# Altium PCB SW.PcbDoc (part 1 of 2)
Units mm, origin at the board's own origin, x right, y up, seen from the top; angles counter-clockwise.
Board outline 130 x 71 mm, 4 copper layers (Top Layer, Mid Layer 1, Mid Layer 2, Bottom Layer), stack 1.57 mm thick; 152 components, 276 nets, 868 pads, 520 vias.
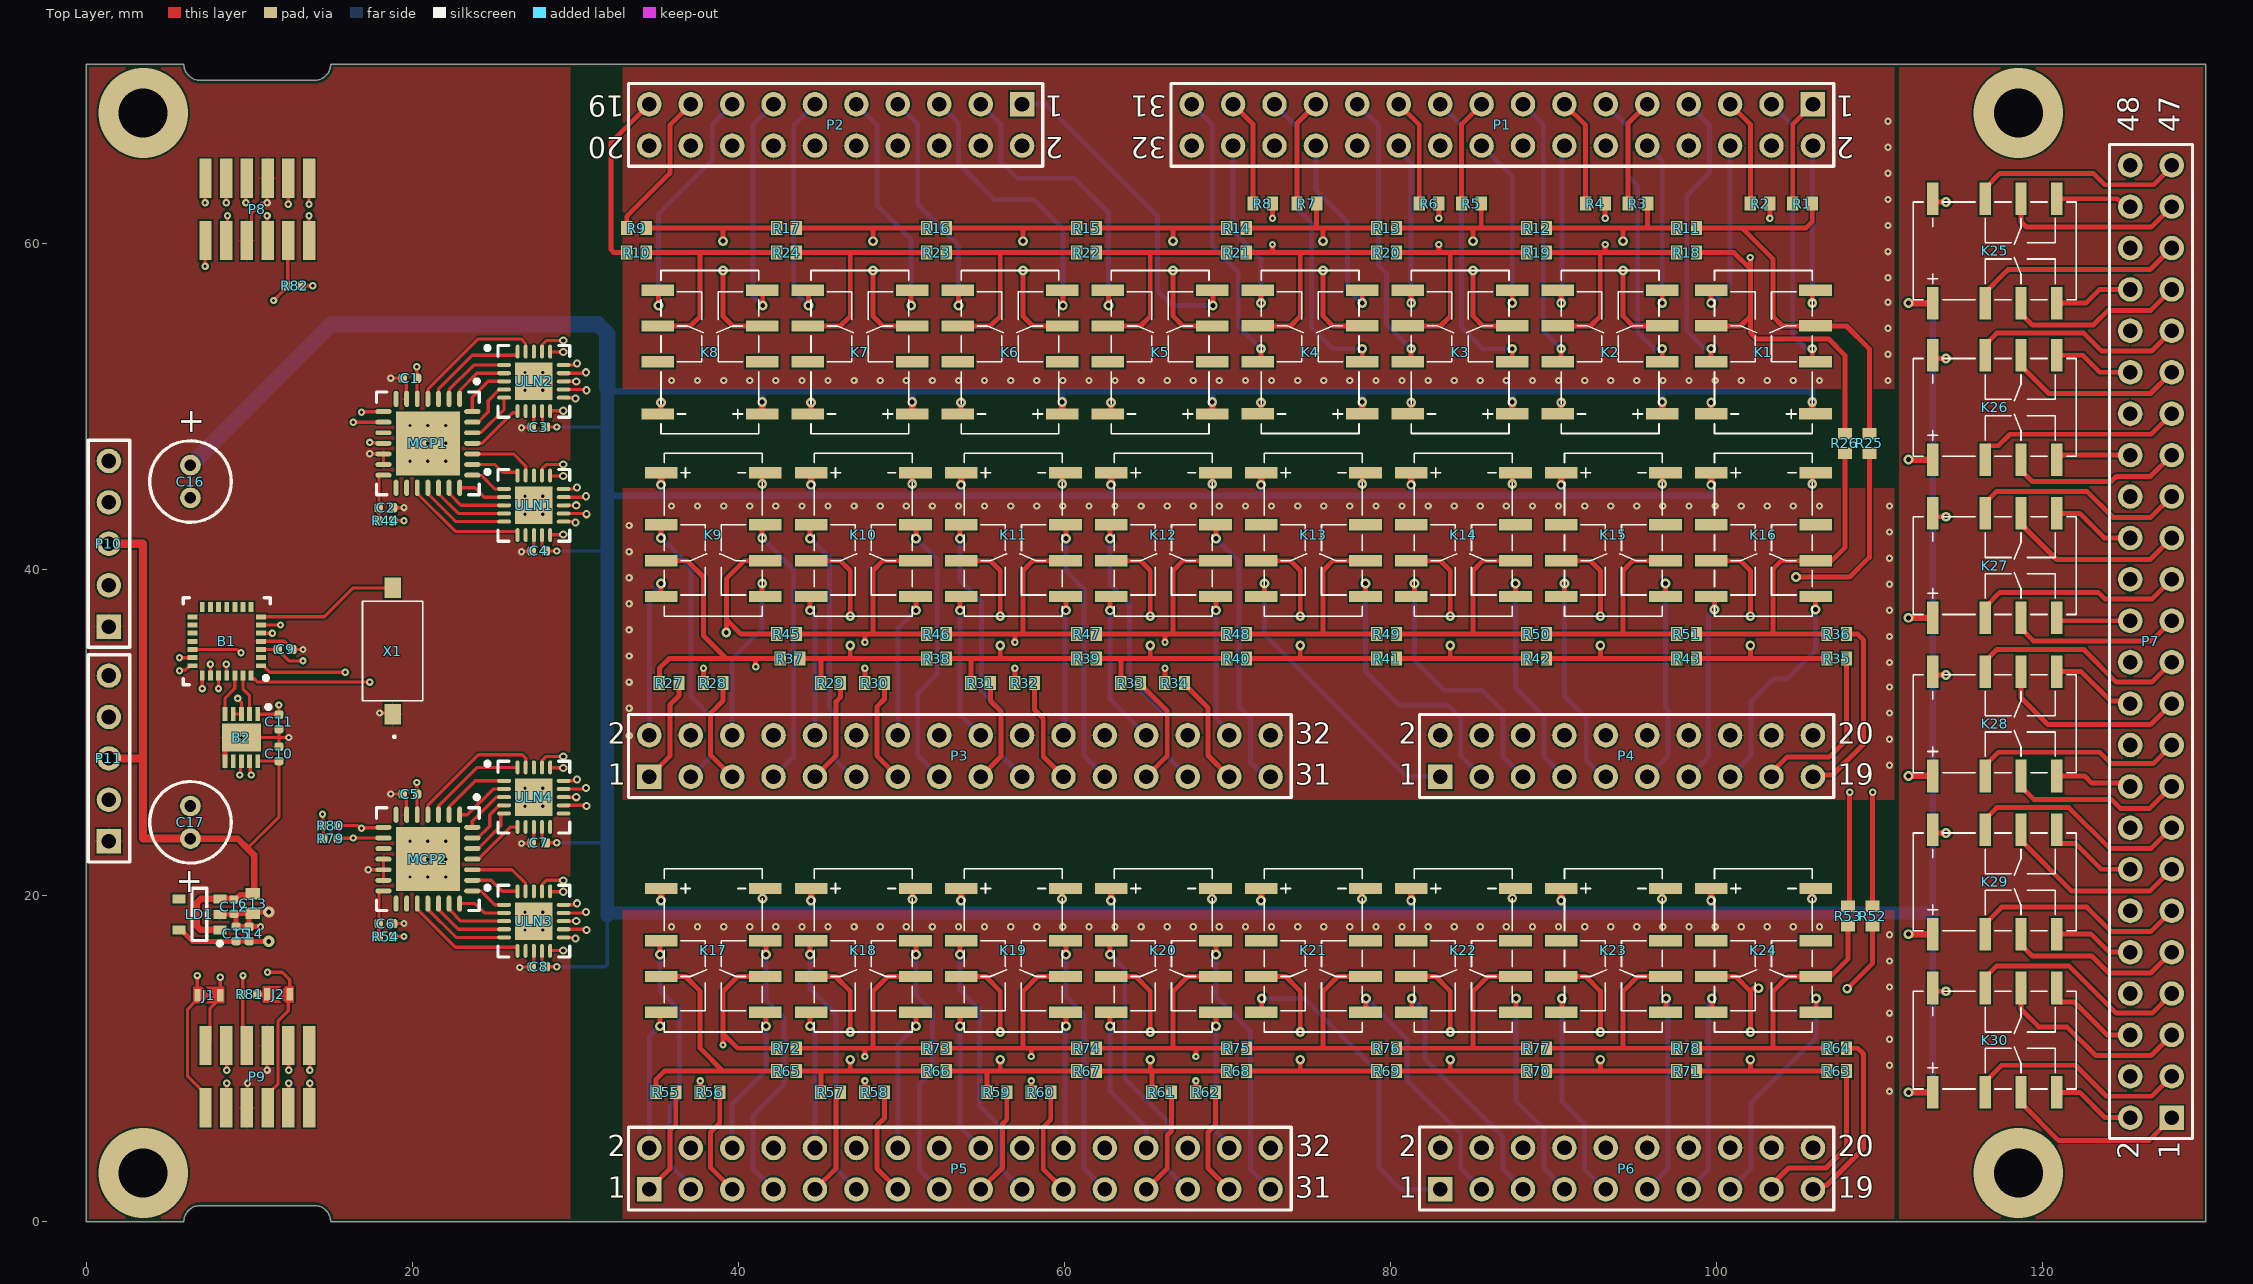
[diagram p0: Top Layer view]
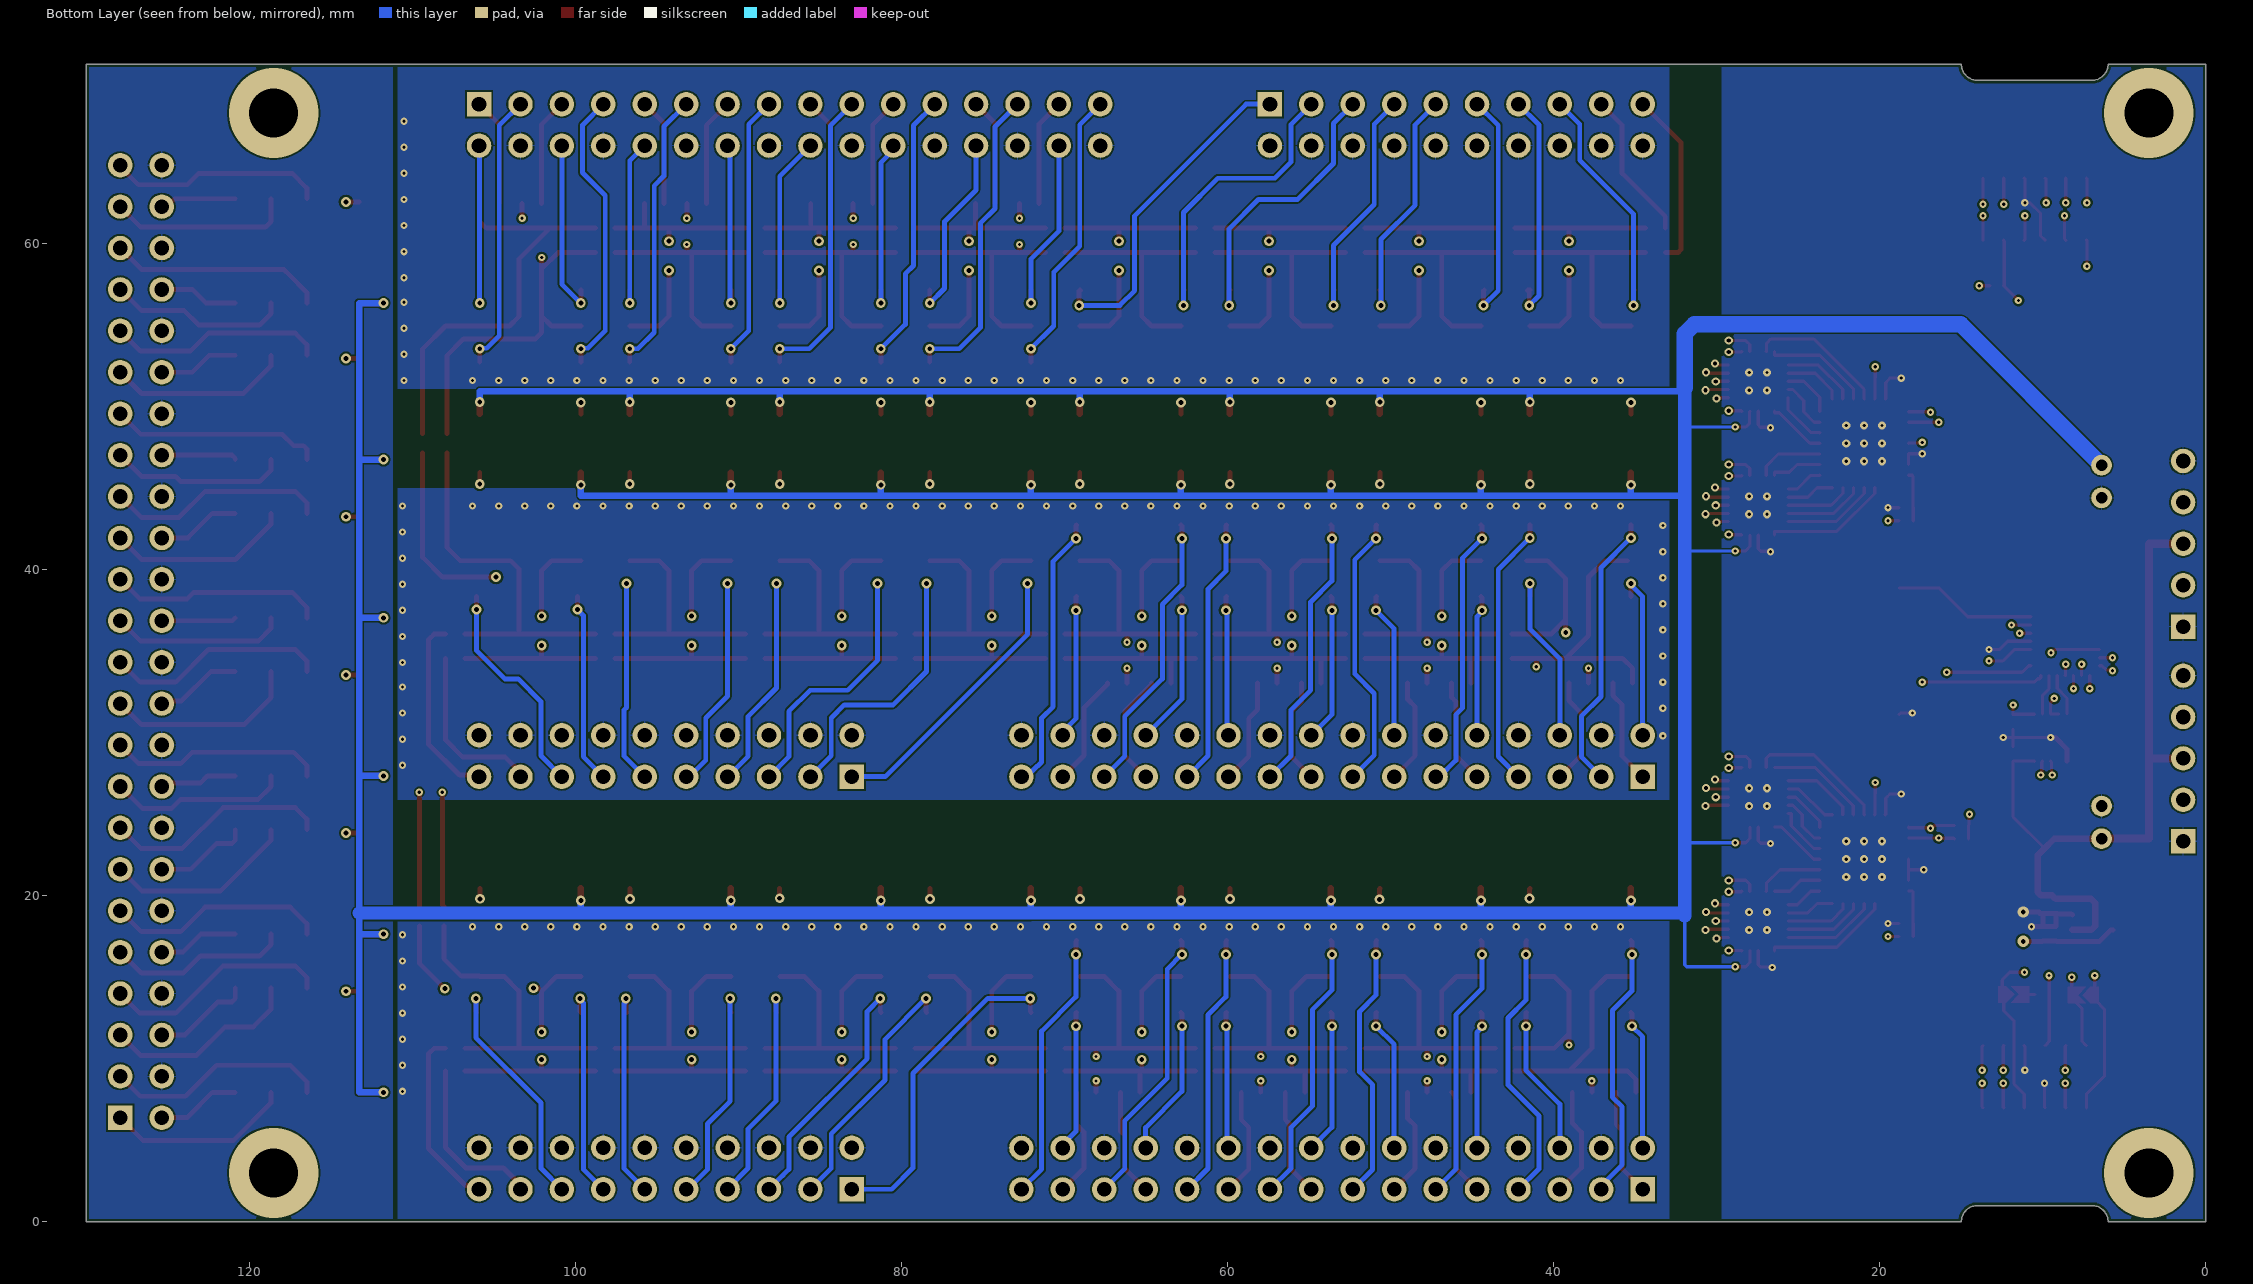
[diagram p1: Bottom Layer view, seen from below]
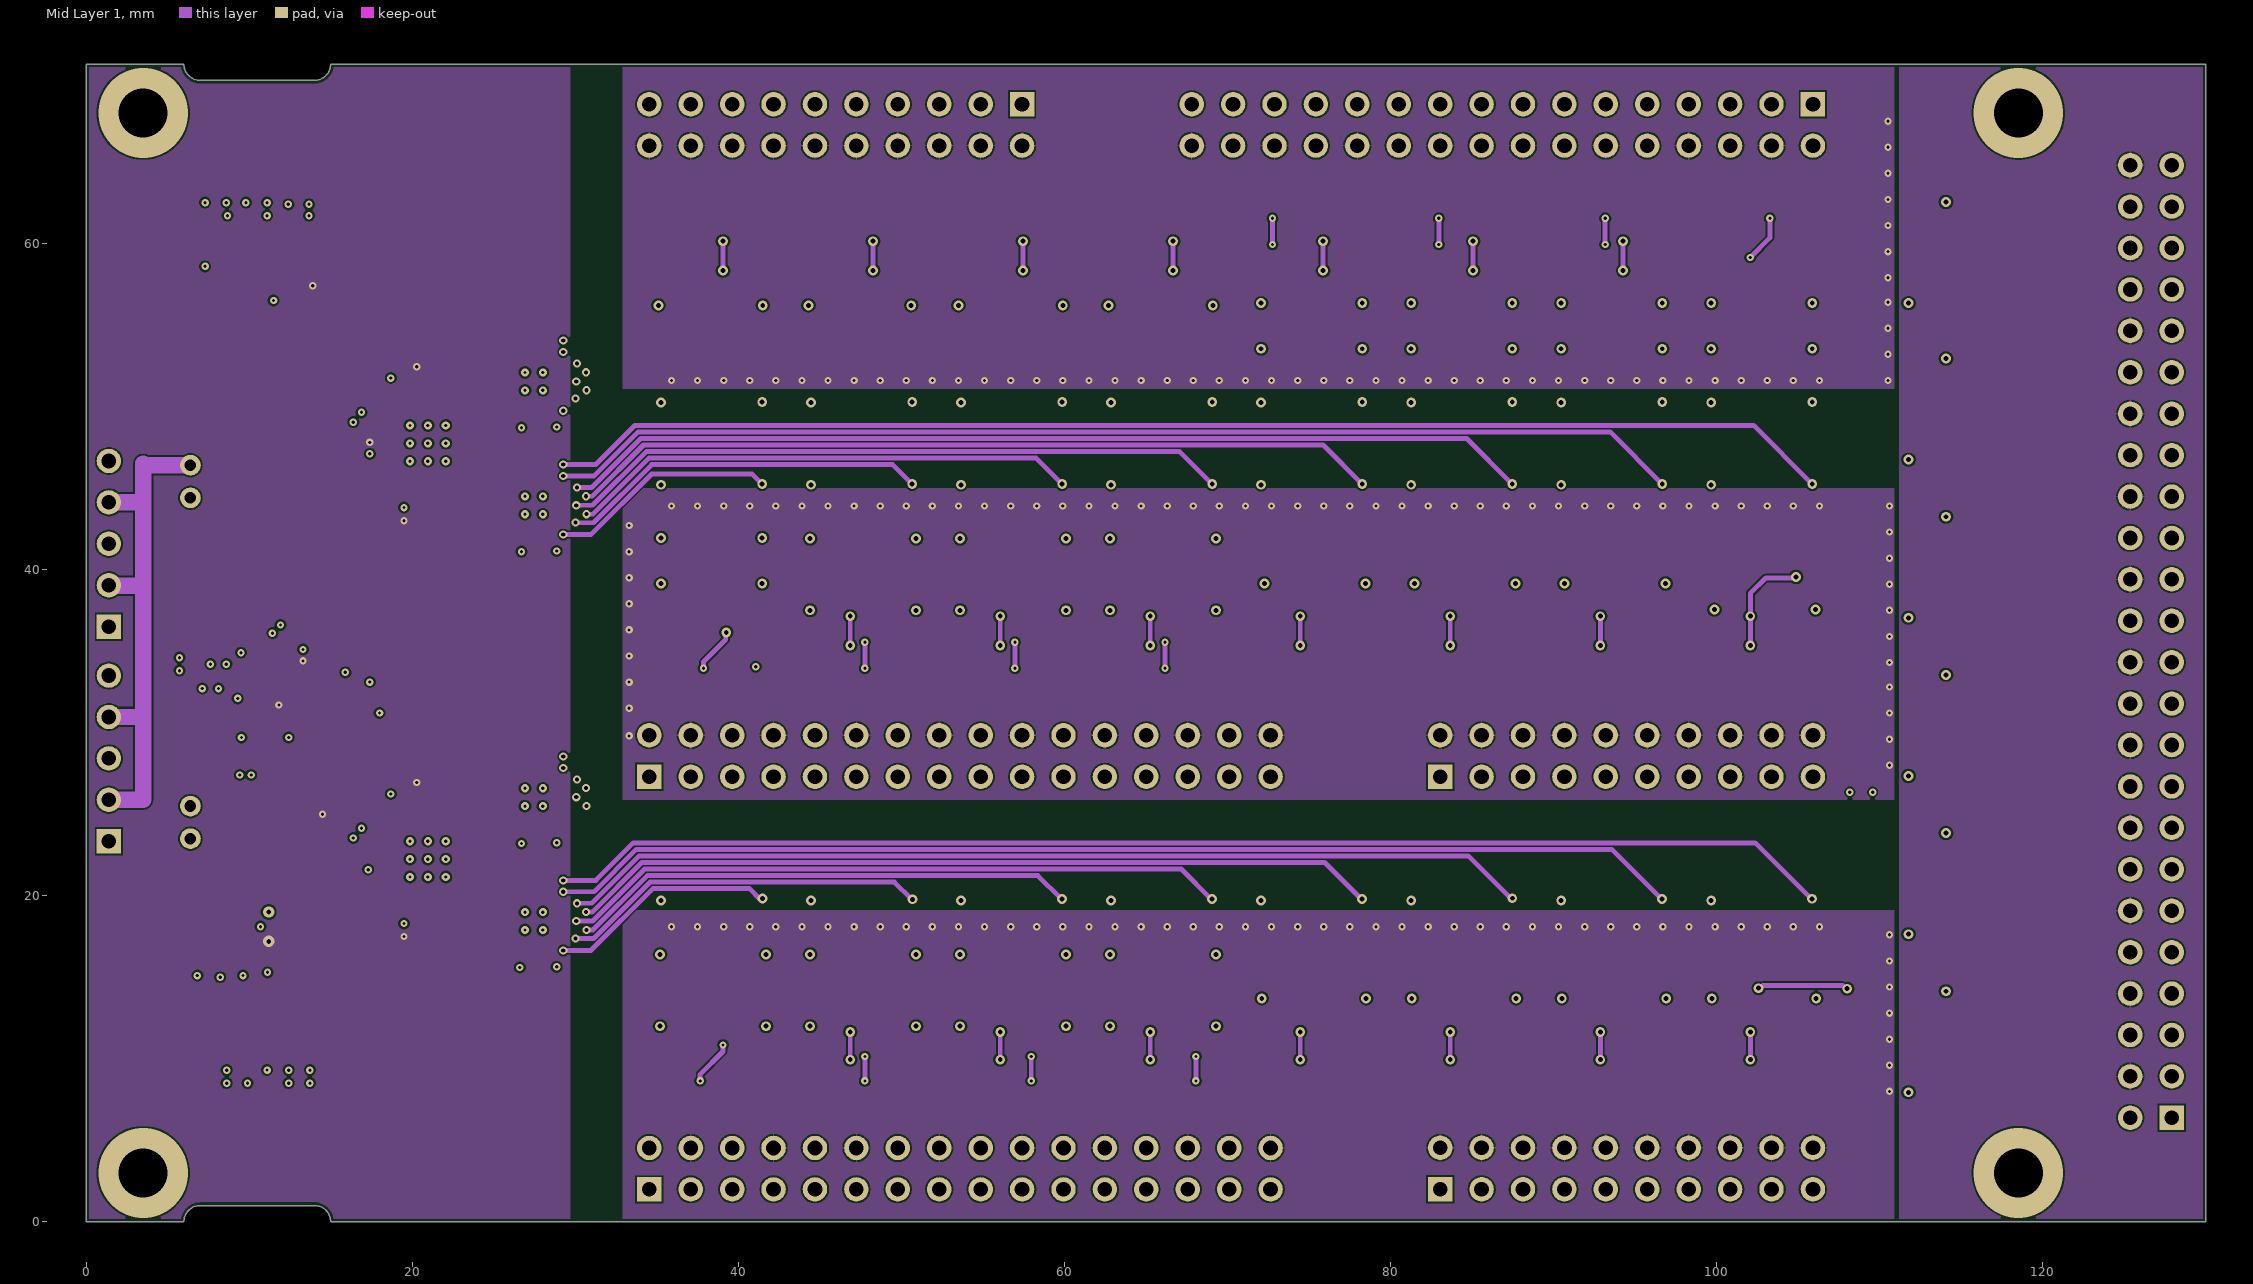
[diagram p2: Mid Layer 1]
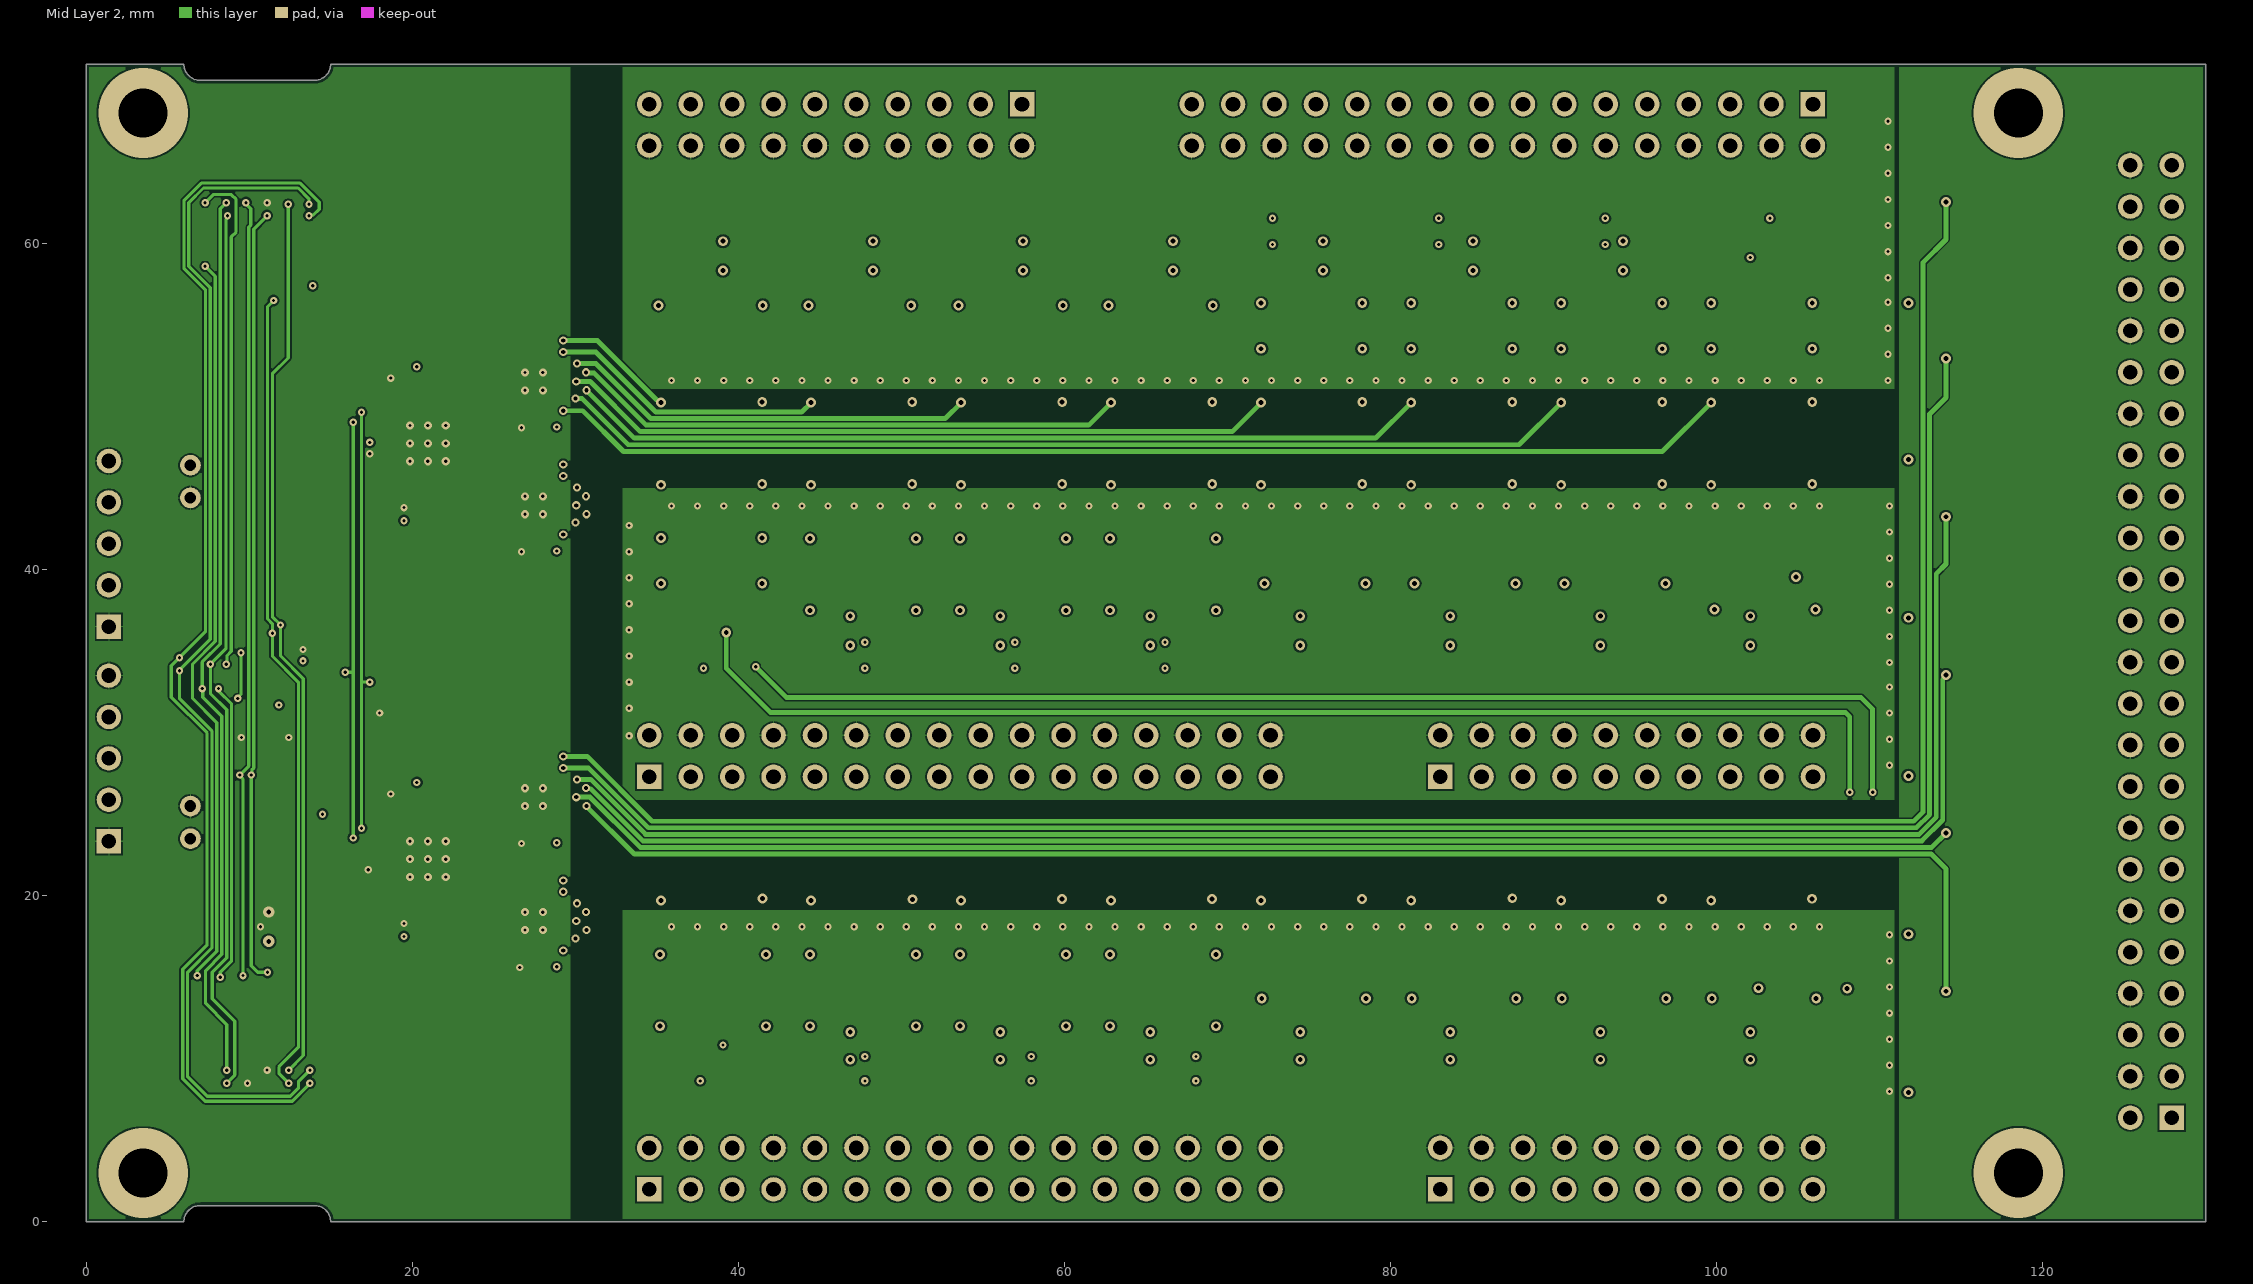
[diagram p3: Mid Layer 2]
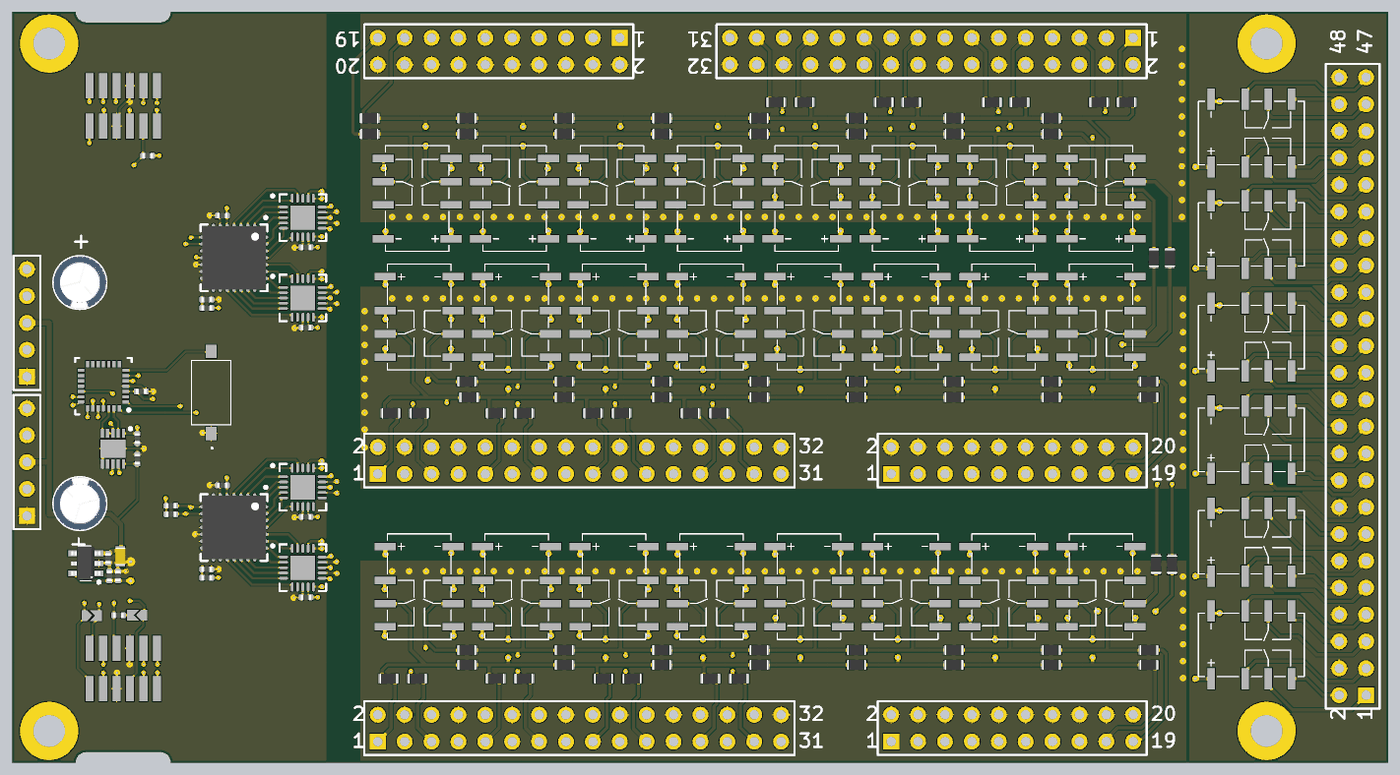
[diagram p5: 3D render of the assembled board from above, using the file's embedded part models]

## Layer stack, top to bottom
Top Solder: solder mask 0.0127, Solder Resist, Dk 3.8
Top Layer: signal copper 0.035
Dielectric 1: prepreg 0.2, 7628, Dk 4.6
Mid Layer 1: signal copper 0.0175
Core: core 1.065, FR-4, Dk 4.5
Mid Layer 2: signal copper 0.0175
Dielectric 2: prepreg 0.2, 7628, Dk 4.6
Bottom Layer: signal copper 0.035
Bottom Solder: solder mask 0.0127, Solder Resist, Dk 3.8

## Board outline
0,0 0,71 6,71 ccw(c7,71) 7,70 14,70 ccw(c14,71) 15,71 130,71 130,0 15,0 ccw(c14,0) 14,1 7,1 ccw(c7,0) 6,0

## Design rules (kind name [scope] priority, off if disabled: settings)
BoardOutlineClearance [All] p1: gap=0.2 ignorepadtopadclearanceinfootprint=FALSE
Clearance [All] p1: gap=0.102 ignorepadtopadclearanceinfootprint=FALSE except(0.127: Arc-Via Track-Via SMDPad-Via THPad-Via Via-Via Via-Fill Via-Poly Via-Region Via-Text; 0.25: Arc-Hole Track-Hole SMDPad-Hole THPad-Hole Via-Hole Fill-Hole Poly-Hole Region-Hole Text-Hole)
ComponentClearance [All] p1: gap=0.102 collisioncheckmode=3 verticalgap=0.102 showdistances=TRUE
DiffPairsRouting [All] p1: maxlimit=0.102 minlimit=0.102 mostfreqgap=0.102 toplayer_minwidth=0.102 toplayer_maxwidth=1816.048 toplayer_prefwidth=0.102 midlayer1_minwidth=0.102 midlayer1_maxwidth=1816.048 midlayer1_prefwidth=0.102 midlayer2_minwidth=0.102 midlayer2_maxwidth=1816.048 midlayer2_prefwidth=0.102 bottomlayer_minwidth=0.102 bottomlayer_maxwidth=1816.048 bottomlayer_prefwidth=0.102 maxuncoupledlength=12.7
Height [All] p1: minheight=0 maxheight=1816.048 prefheight=12.7
HoleSize [All] p1: absolutevalues=TRUE maxlimit=6.3 minlimit=0.2 maxpercent=80.000 minpercent=20.000
HoleToHoleClearance [All] p1: gap=0.25 allowstackedmicrovias=FALSE
MinimumAnnularRing [All] p1: minimumring=0.076
MinimumSolderMaskSliver [All] p1: minsoldermaskwidth=0
PlaneClearance [All] p1: clearance=0.102
PlaneConnect PlaneConnectPowerPads [InPadClass('PowerPads')] p1: planeconnectstyle=Direct reliefexpansion=0.508 reliefentries=4 reliefconductorwidth=0.254 reliefairgap=0.254
PlaneConnect [All] p2: pad.planeconnectstyle=Relief pad.reliefexpansion=0.3 pad.reliefentries=4 pad.reliefconductorwidth=0.102 pad.reliefairgap=0.102 via.planeconnectstyle=Direct via.reliefexpansion=0.3 via.reliefentries=4 via.reliefconductorwidth=0.127 via.reliefairgap=0.127
PolygonConnect PolygonConnectPowerPads [All vs (InPadClass('PowerPads'))] p1: connectstyle=Direct reliefconductorwidth=0.254 reliefentries=4 polygonreliefangle="90 Angle" airgapwidth=0.254
PolygonConnect [All] p2: thpad.connectstyle=Relief thpad.reliefconductorwidth=0.102 thpad.reliefentries=4 thpad.polygonreliefangle="90 Angle" thpad.airgapwidth=0.102 smdpad.connectstyle=Relief smdpad.reliefconductorwidth=0.102 smdpad.reliefentries=4 smdpad.polygonreliefangle="90 Angle" smdpad.airgapwidth=0.102 via.connectstyle=Direct via.reliefconductorwidth=0.127 via.reliefentries=4 via.polygonreliefangle="90 Angle" via.airgapwidth=0.127
RoomDefinition U_SW [InComponentClass('U_SW')] p1: confinementstyle=ConfineIn formatcopy=TRUE lockcomponents=FALSE outline 17.4,0.1 130,0.1 130,71 17.4,71
RoomDefinition U_Power [InComponentClass('U_Power')] p2: confinementstyle=ConfineIn formatcopy=TRUE lockcomponents=FALSE outline -27.29,3.9 13.3,3.9 13.3,58.826 -27.29,58.826
RoomDefinition U_MCU [InComponentClass('U_MCU')] p3: confinementstyle=ConfineIn formatcopy=TRUE lockcomponents=FALSE outline 1.019,-18.835 22.228,-18.835 22.228,70.446 1.019,70.446
RoutingVias [All] p1: holewidth=0.2 width=0.45 viastyle="Through Hole" minholewidth=0.2 minwidth=0.45 maxholewidth=6.3 maxwidth=6.55
SilkToSilkClearance [All] p1: silktosilkclearance=0
SilkToSolderMaskClearance [IsPad] p1: minsilkscreentomaskgap=0.102 clearancetoexposedcopper=TRUE
SolderMaskExpansion [All] p1: expansion=0.075 istentingtop=FALSE
Width [All] p1: maxlimit=1816.048 minlimit=0.102 preferedwidth=0.102
20 further rules are at their usual default settings.

## Classes and differential pairs
component class U_SW: C1 C2 C3 C4 C5 C6 C7 C8 K1 K2 K3 K4 K5 K6 K7 K8 K9 K10 K11 K12 K13 K14 K15 K16 K17 K18 K19 K20 K21 K22 K23 K24 K25 K26 K27 K28 K29 K30 MCP1 MCP2 P1 P2 P3 P4 P5 P6 P7 R1 R2 R3 R4 R5 R6 R7 R8 R9 R10 R11 R12 R13 R14 R15 R16 R17 R18 R19 R20 R21 R22 R23 R24 R25 R26 R27 R28 R29 R30 R31 R32 R33 R34 R35 R36 R37 R38 R39 R40 R41 R42 R43 R44 R45 R46 R47 R48 R49 R50 R51 R52 R53 R54 R55 R56 R57 R58 R59 R60 R61 R62 R63 R64 R65 R66 R67 R68 R69 R70 R71 R72 R73 R74 R75 R76 R77 R78 ULN1 ULN2 ULN3 ULN4
component class U_Power: C12 C13 C14 C15 C16 C17 LD1 P10 P11
component class U_MCU: B1 B2 C9 C10 C11 J1 J2 P8 P9 R79 R80 R81 R82 X1

## Components (designator, comment, footprint, x,y, rotation, side; value= is the part's Value field where it differs from the comment)
B1 "STM32C031G6U6" QFN50P400X400X60-28N-D 8.625,35.6 r180 top
B2 "XR33202EEHBTR-F" SON50P300X300X80-11N-D 9.525,29.7 r270 top
C1 "100n" R1005_0402i_L 19.858,51.73 r0 top
C2 "100n" R1005_0402i_L 18.385,43.792 r180 top
C3 "100n" R1005_0402i_L 27.76,48.742 r180 top
C4 "100n" R1005_0402i_L 27.76,41.142 r180 top
C5 "100n" R1005_0402i_L 19.858,26.23 r0 top
C6 "100n" R1005_0402i_L 18.385,18.292 r180 top
C7 "100n" R1005_0402i_L 27.76,23.242 r180 top
C8 "100n" R1005_0402i_L 27.76,15.642 r180 top
C9 "100n" R1005_0402i_L 12.2,35.1 r0 top
C10 "100n" R1005_0402i_L 11.825,28.7 r90 top
C11 "100n" R1005_0402i_L 11.825,30.66 r270 top
C12 "100n" R1005_0402i_L 9.065,19.325 r270 top
C13 "22u" C1608_0603I_L 10.22,19.52 r270 top
C14 "1u" R1005_0402i_L 10,17.66 r90 top
C15 "100n" R1005_0402i_L 9.2,17.66 r90 top
C16 "C+" "C AlElko 5x11 R2" 6.4,45.4 r90 top
C17 "C+" "C AlElko 5x11 R2" 6.4,24.5 r270 top
J1 "solder_jumper" solder_jumper_triangle 7.968,14.408 r180 top
J2 "solder_jumper" solder_jumper_triangle 11.344,13.446 r0 top
K1 "DPDT" "AXICOM IM-G Relay" 102.86,53.343 r90 top
K2 "DPDT" "AXICOM IM-G Relay" 93.46,53.343 r90 top
K3 "DPDT" "AXICOM IM-G Relay" 84.26,53.343 r90 top
K4 "DPDT" "AXICOM IM-G Relay" 75.06,53.343 r90 top
K5 "DPDT" "AXICOM IM-G Relay" 65.86,53.34 r90 top
K6 "DPDT" "AXICOM IM-G Relay" 56.66,53.34 r90 top
K7 "DPDT" "AXICOM IM-G Relay" 47.46,53.34 r90 top
K8 "DPDT" "AXICOM IM-G Relay" 38.26,53.34 r90 top
K9 "DPDT" "AXICOM IM-G Relay" 38.461,42.145 r270 top
K10 "DPDT" "AXICOM IM-G Relay" 47.661,42.145 r270 top
K11 "DPDT" "AXICOM IM-G Relay" 56.861,42.145 r270 top
K12 "DPDT" "AXICOM IM-G Relay" 66.061,42.145 r270 top
K13 "DPDT" "AXICOM IM-G Relay" 75.261,42.145 r270 top
K14 "DPDT" "AXICOM IM-G Relay" 84.461,42.145 r270 top
K15 "DPDT" "AXICOM IM-G Relay" 93.661,42.145 r270 top
K16 "DPDT" "AXICOM IM-G Relay" 102.861,42.145 r270 top
K17 "DPDT" "AXICOM IM-G Relay" 38.461,16.644 r270 top
K18 "DPDT" "AXICOM IM-G Relay" 47.661,16.645 r270 top
K19 "DPDT" "AXICOM IM-G Relay" 56.861,16.645 r270 top
K20 "DPDT" "AXICOM IM-G Relay" 66.061,16.644 r270 top
K21 "DPDT" "AXICOM IM-G Relay" 75.261,16.645 r270 top
K22 "DPDT" "AXICOM IM-G Relay" 84.461,16.645 r270 top
K23 "DPDT" "AXICOM IM-G Relay" 93.661,16.645 r270 top
K24 "DPDT" "AXICOM IM-G Relay" 102.861,16.645 r270 top
K25 "DPDT" "AXICOM IM-G Relay" 117.058,59.543 r0 top
K26 "DPDT" "AXICOM IM-G Relay" 117.058,49.943 r0 top
K27 "DPDT" "AXICOM IM-G Relay" 117.058,40.243 r0 top
K28 "DPDT" "AXICOM IM-G Relay" 117.058,30.543 r0 top
K29 "DPDT" "AXICOM IM-G Relay" 117.058,20.843 r0 top
K30 "DPDT" "AXICOM IM-G Relay" 117.058,11.143 r0 top
LD1 "NCP115 3.3V" TSOP95P280X110-6L 6.95,18.85 r180 top
MCP1 "MCP32017" "MCP23017 QFN" 20.96,47.742 r270 top
MCP2 "MCP32017" "MCP23017 QFN" 20.96,22.242 r270 top
P1 "Header 16X2" HDR2X16 105.9,68.54 r180 top
P2 "Header 10X2" HDR2X10 57.4,68.54 r180 top
P3 "Header 16X2" HDR2X16 34.54,27.3 r0 top
P4 "Header 10X2" HDR2X10 83.04,27.3 r0 top
P5 "Header 16X2" HDR2X16 34.54,1.989 r0 top
P6 "Header 10X2" HDR2X10 83.04,2 r0 top
P7 "Header 24X2" HDR2X24 127.9,6.38 r90 top
P8 "Input" "1.27mm SMD conn" 10.5,62.095 r180 top
P9 "Output" "1.27mm SMD conn" 10.5,8.905 r180 top
P10 "Header 5" HDR1X5 1.4,36.5 r90 top
P11 "Header 5" HDR1X5 1.4,23.34 r90 top
R1 "R" R1608_0603I_L 105.26,62.44 r180 top
R2 "R" R1608_0603I_L 102.66,62.44 r180 top
R3 "R" R1608_0603I_L 95.16,62.44 r180 top
R4 "R" R1608_0603I_L 92.56,62.44 r180 top
R5 "R" R1608_0603I_L 84.96,62.44 r180 top
R6 "R" R1608_0603I_L 82.36,62.44 r180 top
R7 "R" R1608_0603I_L 74.86,62.44 r180 top
R8 "R" R1608_0603I_L 72.16,62.44 r180 top
R9 "R" R1608_0603I_L 33.76,60.94 r180 top
R10 "R" R1608_0603I_L 33.76,59.44 r180 top
R11 "R" R1608_0603I_L 98.16,60.94 r180 top
R12 "R" R1608_0603I_L 88.96,60.94 r180 top
R13 "R" R1608_0603I_L 79.76,60.94 r180 top
R14 "R" R1608_0603I_L 70.56,60.94 r180 top
R15 "R" R1608_0603I_L 61.36,60.94 r180 top
R16 "R" R1608_0603I_L 52.16,60.94 r180 top
R17 "R" R1608_0603I_L 42.96,60.94 r180 top
R18 "R" R1608_0603I_L 98.16,59.44 r180 top
R19 "R" R1608_0603I_L 88.96,59.44 r180 top
R20 "R" R1608_0603I_L 79.76,59.44 r180 top
R21 "R" R1608_0603I_L 70.56,59.44 r180 top
R22 "R" R1608_0603I_L 61.36,59.44 r180 top
R23 "R" R1608_0603I_L 52.16,59.44 r180 top
R24 "R" R1608_0603I_L 42.96,59.44 r180 top
R25 "R" R1608_0603I_L 109.36,47.74 r90 top
R26 "R" R1608_0603I_L 107.86,47.74 r90 top
R27 "R" R1608_0603I_L 35.761,33.044 r0 top
R28 "R" R1608_0603I_L 38.461,33.044 r0 top
R29 "R" R1608_0603I_L 45.661,33.044 r0 top
R30 "R" R1608_0603I_L 48.361,33.044 r0 top
R31 "R" R1608_0603I_L 54.861,33.044 r0 top
R32 "R" R1608_0603I_L 57.561,33.044 r0 top
R33 "R" R1608_0603I_L 64.061,33.044 r0 top
R34 "R" R1608_0603I_L 66.761,33.044 r0 top
R35 "R" R1608_0603I_L 107.361,34.544 r0 top
R36 "R" R1608_0603I_L 107.361,36.044 r0 top
R37 "R" R1608_0603I_L 43.161,34.544 r0 top
R38 "R" R1608_0603I_L 52.161,34.544 r0 top
R39 "R" R1608_0603I_L 61.361,34.544 r0 top
R40 "R" R1608_0603I_L 70.561,34.544 r0 top
R41 "R" R1608_0603I_L 79.761,34.544 r0 top
R42 "R" R1608_0603I_L 88.961,34.544 r0 top
R43 "R" R1608_0603I_L 98.161,34.544 r0 top
R44 "100k" R1005_0402i_L 18.385,42.992 r180 top
R45 "R" R1608_0603I_L 42.961,36.044 r0 top
R46 "R" R1608_0603I_L 52.161,36.044 r0 top
R47 "R" R1608_0603I_L 61.361,36.044 r0 top
R48 "R" R1608_0603I_L 70.561,36.044 r0 top
R49 "R" R1608_0603I_L 79.761,36.044 r0 top
R50 "R" R1608_0603I_L 88.961,36.044 r0 top
R51 "R" R1608_0603I_L 98.161,36.044 r0 top
R52 "R" R1608_0603I_L 109.561,18.744 r90 top
R53 "R" R1608_0603I_L 108.061,18.744 r90 top
R54 "100k" R1005_0402i_L 18.385,17.492 r180 top
R55 "R" R1608_0603I_L 35.561,7.944 r0 top
R56 "R" R1608_0603I_L 38.261,7.944 r0 top
R57 "R" R1608_0603I_L 45.661,7.944 r0 top
R58 "R" R1608_0603I_L 48.361,7.944 r0 top
R59 "R" R1608_0603I_L 55.861,7.944 r0 top
R60 "R" R1608_0603I_L 58.561,7.944 r0 top
R61 "R" R1608_0603I_L 65.961,7.944 r0 top
R62 "R" R1608_0603I_L 68.661,7.944 r0 top
R63 "R" R1608_0603I_L 107.361,9.244 r0 top
R64 "R" R1608_0603I_L 107.361,10.644 r0 top
R65 "R" R1608_0603I_L 42.961,9.244 r0 top
R66 "R" R1608_0603I_L 52.161,9.244 r0 top
R67 "R" R1608_0603I_L 61.361,9.244 r0 top
R68 "R" R1608_0603I_L 70.561,9.244 r0 top
R69 "R" R1608_0603I_L 79.761,9.244 r0 top
R70 "R" R1608_0603I_L 88.961,9.244 r0 top
R71 "R" R1608_0603I_L 98.161,9.244 r0 top
R72 "R" R1608_0603I_L 42.961,10.644 r0 top
R73 "R" R1608_0603I_L 52.161,10.644 r0 top
R74 "R" R1608_0603I_L 61.361,10.644 r0 top
R75 "R" R1608_0603I_L 70.561,10.644 r0 top
R76 "R" R1608_0603I_L 79.761,10.644 r0 top
R77 "R" R1608_0603I_L 88.961,10.644 r0 top
R78 "R" R1608_0603I_L 98.161,10.644 r0 top
R79 "10k" R1005_0402i_L 15,23.5 r0 top
R80 "10k" R1005_0402i_L 15,24.3 r0 top
R81 "120" R1005_0402i_L 10.044,13.946 r180 top
R82 "100k" R1005_0402i_L 12.8,57.4 r180 top
ULN1 "ULN2803" QFN127P600-8N 27.46,43.942 r0 top
ULN2 "ULN2803" QFN127P600-8N 27.46,51.542 r0 top
ULN3 "ULN2803" QFN127P600-8N 27.46,18.442 r0 top
ULN4 "ULN2803" QFN127P600-8N 27.46,26.042 r0 top
X1 "PTS636_SM25_SMTR_LFS" PTS636SM25SMTRLFS 18.8,35 r90 top

## Footprints (in the part's own frame and the unit in brackets; to place one, negate y for a bottom-side part, rotate by r counter-clockwise, add the part's x,y. Pads: shape width x height; smd on the part's side, far side on the other; paste and mask are expansions set on the pad)
"1.27mm SMD conn" [mm]
  rect 0.76x2.4 smd: 1(3.175,1.905) 2(3.175,-1.905) 3(1.905,1.905) 4(1.905,-1.905) 5(0.635,1.905) 6(0.635,-1.905) 7(-0.635,1.905) 8(-0.635,-1.905) 9(-1.905,1.905) 10(-1.905,-1.905) 11(-3.175,1.905) 12(-3.175,-1.905)
"AXICOM IM-G Relay" [mm] "TE CONNECTIVITY AXICOM IM-G (Gull wings) Relay SMD"
  rect 0.7x2 smd: 1(-3.797,-3.2) 2(-0.597,-3.2) 3(1.6,-3.2) 4(3.797,-3.2) 5(3.797,3.2) 6(1.6,3.2) 7(-0.597,3.2) 8(-3.797,3.2)
  silkscreen extent -5,-3 5,3
C1608_0603I_L [mm] "Chip Capacitor, 2-Leads, Body 1.57x0.85mm, IPC High Density"
  rect 0.72x0.9 smd: 1(-0.6,0) 2(0.6,0)
  body extent -0.83,-0.47 0.82,0.48, height 0.95
"C AlElko 5x11 R2" [mm]
  round 1.27 hole 0.711: 1(1,0) 2(-1,0)
  silkscreen extent -2.5,-2.5 2.5,2.5, body extent -2.5,-2.5 2.5,2.5, height 11.01
HDR1X5 [mm] "Connector; Header; 5 Position"
  rect 1.5x1.5 hole 0.9: 1(0,0)
  round 1.5 hole 0.9: 2(2.54,0) 3(5.08,0) 4(7.62,0) 5(10.16,0)
  silkscreen extent -1.27,-1.27 11.43,1.27
HDR2X10 [mm] "Connector; Header; 10x2 Position"
  rect 1.5x1.5 hole 0.9: 1(0,0)
  round 1.5 hole 0.9: 2(0,2.54) 3(2.54,0) 4(2.54,2.54) 5(5.08,0) 6(5.08,2.54) 7(7.62,0) 8(7.62,2.54) 9(10.16,0) 10(10.16,2.54) 11(12.7,0) 12(12.7,2.54) 13(15.24,0) 14(15.24,2.54) 15(17.78,0) 16(17.78,2.54) 17(20.32,0) 18(20.32,2.54) 19(22.86,0) 20(22.86,2.54)
  silkscreen extent -1.27,-1.27 24.13,3.81
HDR2X16 [mm] "Connector; Header; 16x2 Position"
  rect 1.5x1.5 hole 0.9: 1(0,0)
  round 1.5 hole 0.9: 2(0,2.54) 3(2.54,0) 4(2.54,2.54) 5(5.08,0) 6(5.08,2.54) 7(7.62,0) 8(7.62,2.54) 9(10.16,0) 10(10.16,2.54) 11(12.7,0) 12(12.7,2.54) 13(15.24,0) 14(15.24,2.54) 15(17.78,0) 16(17.78,2.54) 17(20.32,0) 18(20.32,2.54) 19(22.86,0) 20(22.86,2.54) 21(25.4,0) 22(25.4,2.54) 23(27.94,0) 24(27.94,2.54) 25(30.48,0) 26(30.48,2.54) 27(33.02,0) 28(33.02,2.54) 29(35.56,0) 30(35.56,2.54) 31(38.1,0) 32(38.1,2.54)
  silkscreen extent -1.27,-1.27 39.37,3.81
HDR2X24 [mm] "Connector; Header; 24x2 Position"
  rect 1.5x1.5 hole 0.9: 1(0,0)
  round 1.5 hole 0.9: 2(0,2.54) 3(2.54,0) 4(2.54,2.54) 5(5.08,0) 6(5.08,2.54) 7(7.62,0) 8(7.62,2.54) 9(10.16,0) 10(10.16,2.54) 11(12.7,0) 12(12.7,2.54) 13(15.24,0) 14(15.24,2.54) 15(17.78,0) 16(17.78,2.54) 17(20.32,0) 18(20.32,2.54) 19(22.86,0) 20(22.86,2.54) 21(25.4,0) 22(25.4,2.54) 23(27.94,0) 24(27.94,2.54) 25(30.48,0) 26(30.48,2.54) 27(33.02,0) 28(33.02,2.54) 29(35.56,0) 30(35.56,2.54) 31(38.1,0) 32(38.1,2.54) 33(40.64,0) 34(40.64,2.54) 35(43.18,0) 36(43.18,2.54) 37(45.72,0) 38(45.72,2.54) 39(48.26,0) 40(48.26,2.54) 41(50.8,0) 42(50.8,2.54) 43(53.34,0) 44(53.34,2.54) 45(55.88,0) 46(55.88,2.54) 47(58.42,0) 48(58.42,2.54)
  silkscreen extent -1.27,-1.27 59.69,3.81
"MCP23017 QFN" [mm] "QFN, 28-Leads, Body 6,00x6,00mm, Pitch 0,65mm, Thermal Pad 3,93x3,93mm, IPC High Density"
  oval 1x0.3 smd: 1(-2.725,1.95) 2(-2.725,1.3) 3(-2.725,0.65) 4(-2.725,0) 5(-2.725,-0.65) 6(-2.725,-1.3) 7(-2.725,-1.95) 15(2.725,-1.95) 16(2.725,-1.3) 17(2.725,-0.65) 18(2.725,0) 19(2.725,0.65) 20(2.725,1.3) 21(2.725,1.95)
  oval 0.3x1 smd: 8(-1.95,-2.725) 9(-1.3,-2.725) 10(-0.65,-2.725) 11(0,-2.725) 12(0.65,-2.725) 13(1.3,-2.725) 14(1.95,-2.725) 22(1.95,2.725) 23(1.3,2.725) 24(0.65,2.725) 25(0,2.725) 26(-0.65,2.725) 27(-1.3,2.725) 28(-1.95,2.725)
  rect 3.93x3.93 smd: 29(0,0)
  silkscreen extent -3.92,-3.15 3.15,3.15, body extent -3,-3 3,3, height 0.9
PTS636SM25SMTRLFS [mm]
  rect 1.25x1 smd: 1(-3.875,0) 2(3.875,0)
  silkscreen extent -5.3,-1.85 3.05,1.85
QFN50P400X400X60-28N-D [mm]
  rect 0.6x0.3 smd: 1(-2.1,1.5) 2(-2.1,1) 3(-2.1,0.5) 4(-2.1,0) 5(-2.1,-0.5) 6(-2.1,-1) 7(-2.1,-1.5) 15(2.1,-1.5) 16(2.1,-1) 17(2.1,-0.5) 18(2.1,0) 19(2.1,0.5) 20(2.1,1) 21(2.1,1.5)
  rect 0.3x0.6 smd: 8(-1.5,-2.1) 9(-1,-2.1) 10(-0.5,-2.1) 11(0,-2.1) 12(0.5,-2.1) 13(1,-2.1) 14(1.5,-2.1) 22(1.5,2.1) 23(1,2.1) 24(0.5,2.1) 25(0,2.1) 26(-0.5,2.1) 27(-1,2.1) 28(-1.5,2.1)
  silkscreen extent -2.67,-2.67 2.67,2.67
QFN127P600-8N [mm]
  oval 0.85x0.25 smd: 1(-1.825,1) 2(-1.825,0.5) 3(-1.825,0) 4(-1.825,-0.5) 5(-1.825,-1) 11(1.825,-1) 12(1.825,-0.5) 13(1.825,0) 14(1.825,0.5) 15(1.825,1)
  oval 0.25x0.85 smd: 6(-1,-1.825) 7(-0.5,-1.825) 8(0,-1.825) 9(0.5,-1.825) 10(1,-1.825) 16(1,1.825) 17(0.5,1.825) 18(0,1.825) 19(-0.5,1.825) 20(-1,1.825)
  rect 2.3x2.3 smd: 21(0,0)
  silkscreen extent -2.97,-2.2 2.2,2.2, body extent -2.05,-2.05 2.05,2.05, height 0.8
R1005_0402i_L [mm] "Resistor, Chip; 1.00 mm L X 0.50 mm W X 0.40 mm H body"
  rrect50% 0.52x0.56 smd: 1(-0.44,0) 2(0.44,0)
  body extent -0.5,-0.25 0.5,0.25, height 0.4
R1608_0603I_L [mm] "Chip Resistor, 2-Leads, Body 1.57x0.85mm, IPC High Density"
  rect 0.7x0.85 smd: 1(-0.6,0) 2(0.6,0)
  body extent -0.82,-0.48 0.82,0.48, height 0.5
solder_jumper_triangle [mil]
  rect 15x30 smd paste+0 mask+0: 1(45,20) 2(-10,20)
  Top Layer region: 5,20 25,40 -20,40 -20,0 25,0
  Top Layer region: 55,40 35,40 15,20 35,0 55,0
SON50P300X300X80-11N-D [mm]
  rect 0.85x0.3 smd: 1(-1.45,1) 2(-1.45,0.5) 3(-1.45,0) 4(-1.45,-0.5) 5(-1.45,-1) 6(1.45,-1) 7(1.45,-0.5) 8(1.45,0) 9(1.45,0.5) 10(1.45,1)
  rect 1.7x2.4 smd: 11(0,0)
  silkscreen extent -2,1.53 -1.75,1.78
TSOP95P280X110-6L [mm] "TSOP, 6-Leads, Body 2,87x1,50mm, Pitch 0,95mm, IPC High Density"
  rect 0.8x0.55 smd: 1(-1.25,0.95) 2(-1.25,0) 3(-1.25,-0.95) 4(1.25,-0.95) 5(1.25,0.95)
  silkscreen extent -1.38,-1.6 0.45,1.9, body extent -1.38,-1.6 1.38,1.6, height 1.1

## Part data
B1: "Mainstream Arm Cortex-M0+ MCU with 32 Kbytes of Flash memory, 12 Kbytes RAM, 48 MHz CPU, 2x USART, timers, ADC, comm. I/F, 2-3.6V", Manufacturer_Name=STMicroelectronics, Mouser Part Number=511-STM32C031G6U6, Datasheet Link=https://www.st.com/resource/en/datasheet/stm32c031c4.pdf, Geometry.Height=0.6mm, Manufacturer_Part_Number=STM32C031G6U6, Mouser Price/Stock=https://www.mouser.co.uk/ProductDetail/STMicroelectronics/STM32C031G6U6?qs=IPgv5n7u5QZqRf3nOTChhw%3D%3D
B2: "RS-422/RS-485 Interface IC Wide Supply Trans with I/O Interface", Manufacturer_Name="MaxLinear, Inc.", Mouser Part Number=701-XR33202EEHBTR-F, Datasheet Link=https://www.maxlinear.com/ds/xr33202.pdf, Geometry.Height=0.8mm, Manufacturer_Part_Number=XR33202EEHBTR-F, Mouser Price/Stock=https://www.mouser.co.uk/ProductDetail/MaxLinear/XR33202EEHBTR-F?qs=GtWAI9k6EVi4nRW8bj1LFw%3D%3D
C1 C2 C3 C4 C5 C6 C7 C8 C9 C10 C11 C12 C13 C14 C15: library part C, "Capacitor"
C16 C17: "Capacitor Polarized"
K1 K2 K3 K4 K5 K6 K7 K8 K9 K10 K11 K12 K13 K14 K15 K16 K17 K18 K19 K20 K21 K22 K23 K24 K25 K26 K27 K28 K29 K30: library part "IM-GR Relay DPDT", "TE CONNECTIVITY  IM-GR  RELAY, DPDT, NO", Farnell ID=1175070, URL=http://si.farnell.com/te-connectivity-axicom/im06gr/relay-gull-wing-dpco-12vdc-2a/dp/1175070
P1 P3 P5: "Header, 16-Pin, Dual row", LatestRevisionDate=17-Jul-2002, LatestRevisionNote="Re-released for DXP Platform.", Publisher="Altium Limited"
P2 P4 P6: "Header, 10-Pin, Dual row", LatestRevisionDate=17-Jul-2002, LatestRevisionNote="Re-released for DXP Platform.", Publisher="Altium Limited"
P7: "Header, 24-Pin, Dual row", LatestRevisionDate=17-Jul-2002, LatestRevisionNote="Re-released for DXP Platform.", Publisher="Altium Limited"
P8 P9: library part "Header 6X2", "Header, 6-Pin, Dual row", LatestRevisionDate=17-Jul-2002, LatestRevisionNote="Re-released for DXP Platform.", Publisher="Altium Limited"
P10 P11: "Header, 5-Pin", LatestRevisionDate=17-Jul-2002, LatestRevisionNote="Re-released for DXP Platform.", Publisher="Altium Limited"
R44 R54 R79 R80 R81 R82: library part R, "R"
X1: "Tactile Switches Tact 50mA 12VDC, 6.0x3.5, 2.5mm H, 180gf, G leads, No ground pin, White Actuator", Manufacturer_Name="C & K COMPONENTS", Manufacturer_Part_Number="PTS636 SM25 SMTR LFS", Mouser Part Number=611-PTS636SM25SMTRLF, Datasheet Link="https://componentsearchengine.com/Datasheets/1/PTS636 SM25 SMTR LFS.pdf", Geometry.Height=2.7mm, Mouser Price/Stock=https://www.mouser.co.uk/ProductDetail/CK/PTS636-SM25-SMTR-LFS?qs=vLWxofP3U2yIXR4iooxesw%3D%3D

## Via types
v1: diameter 0.45, hole 0.2, Top Layer to Bottom Layer, 270 vias
v2: diameter 0.6, hole 0.3, Top Layer to Bottom Layer, 180 vias
v3: diameter 0.5, hole 0.2, Top Layer to Bottom Layer, 34 vias
v4: diameter 0.5, hole 0.25, Top Layer to Bottom Layer, 30 vias
v5: diameter 5.5, hole 3, Top Layer to Bottom Layer, 4 vias
v6: diameter 0.7, hole 0.3, Top Layer to Bottom Layer, 2 vias

## Nets (pads, with @x,y where several pads share a name; then routed paths per layer and width w, separated by ;. In a path a pad name is that pad's centre, name@x,y a point inside that pad or via, vN(x,y) a via of type N, cw(c..) or ccw(c..) an arc to the next point about the centre after c; other vN are vias at no path point)
+3V3: B1.3 B2.1 C1.2 C5.2 C9.1 C11.1 C14.1 C15.1 LD1.5 MCP1.5 MCP1.11 MCP2.5 R44.1 R54.1 R79.1 R80.1 R82.1 | length 19
  Top Layer w0.2: B2.1@10.525,31.15 10.525,31.125 11.8,31.125 C11.1@11.825,31.1 v1(11.825,31.7) ; B1.3@10.725,35.1 C9.1@11.76,35.1 11.76,35.08 12.44,34.4 v1(13.3,34.4) ; R82.1@13.24,57.4 v1(13.9,57.4) ; v1(14.5,25) 14.53,24.97 14.53,24.33 R80.1@14.56,24.3 R79.1@14.56,23.5 ; v1(17.4,47.8) 17.439,47.761 18.216,47.761 MCP1.11@18.235,47.742 ; R54.1@18.825,17.492 19.5,17.492 v1(19.5,17.5) ; R44.1@18.825,42.992 18.829,42.996 19.496,42.996 v1(19.5,43) ; v1(20.285,26.942) 20.285,26.242 C5.2@20.298,26.23 20.298,24.98 MCP2.5@20.31,24.967 ; v1(20.285,52.442) 20.285,51.742 C1.2@20.298,51.73 20.298,50.48 MCP1.5@20.31,50.467
  Top Layer w0.3: LD1.5@5.7,17.9 5.825,17.9 6.525,17.2 9.18,17.2 C15.1@9.2,17.22 C14.1@10,17.22 10.02,17.2 v6(11.2,17.2)
+12: C3.1 C4.1 C7.1 C8.1 C16.1 K1.1 K2.1 K3.1 K4.1 K5.1 K6.1 K7.1 K8.1 K9.1 K10.1 K11.1 K12.1 K13.1 K14.1 K15.1 K16.1 K17.1 K18.1 K19.1 K20.1 K21.1 K22.1 K23.1 K24.1 K25.1 K26.1 K27.1 K28.1 K29.1 K30.1 P10.2 P10.4 P11.2 P11.4 ULN1.9 ULN2.9 ULN3.9 ULN4.9 | length 445
  Top Layer w0.2: ULN3.9@27.96,16.617 27.96,15.918 28.2,15.678 C8.1@28.2,15.642 v1(28.86,15.642) ; ULN4.9@27.96,24.217 27.96,23.518 28.2,23.278 C7.1@28.2,23.242 v1(28.86,23.242) ; ULN1.9@27.96,42.117 27.96,41.418 28.2,41.178 C4.1@28.2,41.142 v1(28.86,41.142) ; ULN2.9@27.96,49.717 27.985,49.692 27.985,48.977 28.2,48.762 C3.1@28.2,48.742 v1(28.86,48.742)
  Top Layer w0.4: v2(35.261,19.699) K17.1@35.261,20.442 ; v2(35.261,45.199) K9.1@35.261,45.942 ; K8.1@41.46,49.543 v2(41.46,50.286) ; v2(44.461,19.699) K18.1@44.46,20.442 ; v2(44.461,45.199) K10.1@44.461,45.942 ; K7.1@50.66,49.543 v2(50.66,50.286) ; v2(53.661,19.699) K19.1@53.66,20.442 ; v2(53.661,45.199) K11.1@53.661,45.942 ; K6.1@59.86,49.543 v2(59.86,50.286) ; v2(62.861,19.699) K20.1@62.861,20.442 ; v2(62.861,45.199) K12.1@62.861,45.942 ; K5.1@69.06,49.542 v2(69.06,50.286) ; v2(72.061,19.699) K21.1@72.061,20.442 ; v2(72.061,45.199) K13.1@72.061,45.942 ; K4.1@78.26,49.543 v2(78.26,50.286) ; v2(81.261,19.699) K22.1@81.261,20.442 ; v2(81.261,45.199) K14.1@81.261,45.942 ; K3.1@87.46,49.543 v2(87.46,50.286) ; v2(90.461,19.699) K23.1@90.461,20.442 ; v2(90.461,45.199) K15.1@90.461,45.942 ; K2.1@96.66,49.543 v2(96.66,50.286) ; v2(99.661,19.699) K24.1@99.661,20.442 ; v2(99.661,45.199) K16.1@99.661,45.942 ; K1.1@105.86,49.543 v2(105.86,50.286) ; v2(111.76,7.942) K30.1@113.26,7.942 ; v2(111.76,17.642) K29.1@113.26,17.642 ; v2(111.76,27.342) K28.1@113.26,27.342 ; v2(111.76,37.042) K27.1@113.26,37.042 ; v2(111.76,46.742) K26.1@113.26,46.742 ; v2(111.76,56.342) K25.1@113.26,56.342
  Mid Layer 1 w1: P11.2@1.4,25.88 3.5,25.88 3.5,30.96 ; P11.4@1.4,30.96 3.5,30.96 ; P10.2@1.4,39.04 1.4,39 3.5,39 ; P10.4@1.4,44.12 3.5,44.12 ; C16.1@6.4,46.4 3.6,46.4 3.5,46.5 3.5,44.12 ; 3.5,30.96 3.5,39 ; 3.5,39 3.5,44.12
  Bottom Layer w0.2: v1(28.86,15.642) 31.843,15.642 31.96,15.759 31.96,18.742 ; v1(28.86,23.242) 31.96,23.242 ; v1(28.86,41.142) 31.96,41.142 ; v1(28.86,48.742) 31.86,48.742 31.96,48.642
  Bottom Layer w0.4: 31.96,43.942 31.96,44.042 ; 31.96,44.542 35.261,44.542 ; 31.96,51.142 31.96,50.942 41.46,50.942 ; 35.261,18.742 v2(35.261,19.699) ; v2(35.261,45.199) 35.261,44.542 ; v2(41.46,50.286) 41.46,50.942 ; v2(44.461,19.699) 44.461,18.742 44.56,18.742 ; v2(44.461,45.199) 44.461,44.542 ; v2(50.66,50.286) 50.66,50.942 ; 53.661,18.742 v2(53.661,19.699) ; v2(53.661,45.199) 53.661,44.542 ; v2(59.86,50.286) 59.86,50.942 ; 62.861,18.742 v2(62.861,19.699) ; v2(62.861,45.199) 62.861,44.542 ; v2(69.06,50.286) 69.06,50.942 ; 72.061,18.742 v2(72.061,19.699) ; v2(72.061,45.199) 72.061,44.542 ; v2(78.26,50.286) 78.26,50.942 ; 81.261,18.742 v2(81.261,19.699) ; v2(81.261,45.199) 81.261,44.542 ; v2(87.46,50.286) 87.46,50.942 ; 90.461,18.742 v2(90.461,19.699) ; v2(90.461,45.199) 90.461,44.542 ; v2(96.66,50.286) 96.66,50.942 ; v2(99.661,19.699) 99.661,18.742 99.76,18.742 ; v2(99.661,45.199) 99.661,44.542 90.461,44.542 ; v2(105.86,50.286) 105.86,50.942 96.66,50.942 ; v2(111.76,7.942) 113.26,7.942 113.26,17.642 ; v2(111.76,17.642) 113.26,17.642 ; v2(111.76,27.342) 113.26,27.342 ; v2(111.76,37.042) 113.26,37.042 ; v2(111.76,46.742) 113.26,46.742 ; v2(111.76,56.342) 113.26,56.342 113.26,46.742 ; 35.261,44.542 44.461,44.542 ; 41.46,50.942 50.66,50.942 ; 44.461,44.542 53.661,44.542 ; 50.66,50.942 59.86,50.942 ; 53.661,44.542 62.861,44.542 ; 59.86,50.942 69.06,50.942 ; 62.861,44.542 72.061,44.542 ; 69.06,50.942 78.26,50.942 ; 72.061,44.542 81.261,44.542 ; 78.26,50.942 87.46,50.942 ; 81.261,44.542 90.461,44.542 ; 87.46,50.942 96.66,50.942 ; 113.26,17.642 113.26,18.929 113.26,27.342 ; 113.26,27.342 113.26,37.042 ; 113.26,37.042 113.26,46.742
  Bottom Layer w0.8: 31.96,18.742 31.96,23.242 31.96,41.142 31.96,43.942 ; 31.96,18.942 41.091,18.942 41.092,18.941 41.799,18.941 41.8,18.942 72.06,18.942 ; 31.96,44.042 31.96,44.542 31.96,48.642 31.96,50.942 ; 72.061,18.929 113.26,18.929
  Bottom Layer w1: C16.1@6.4,46.4 15.042,55.042 31.375,55.042 31.96,54.456 31.96,51.142
A1: K1.3 R1.1 R11.1 R25.2 | length 26.5
  Top Layer w0.3: R11.1@98.76,60.94 101.56,60.94 ; R1.1@105.86,62.44 105.86,61.34 105.46,60.94 101.56,60.94 ; R25.2@109.36,48.34 109.36,53.54 107.96,54.94 105.86,54.94 104.036,54.94 103.46,55.516 103.46,59.04 101.56,60.94
A2: K16.3 R25.1 R35.1 R43.2 | length 32
  Top Layer w0.3: R43.2@98.761,34.544 102.061,34.544 ; K16.3@99.661,40.544 101.461,40.544 102.061,39.944 v2(102.061,37.144) ; v2(102.061,35.344) 102.061,34.644 102.161,34.544 R35.1@106.761,34.544 ; v2(104.861,39.544) 108.161,39.544 109.361,40.744 R25.1@109.361,47.144
  Mid Layer 1 w0.3: v2(102.061,35.344) v2(102.061,37.144) 102.061,38.544 103.003,39.487 104.803,39.487 v2(104.861,39.544)
A22: K9.3 R27.1 R37.1 R52.2 | length 99.1
  Top Layer w0.3: R27.1@35.161,33.044 35.161,33.944 35.761,34.544 39.261,34.544 ; K9.3@35.461,40.544 36.862,40.544 37.861,39.544 37.861,35.944 39.261,34.544 ; v1(41.061,34.044) 41.061,34.544 ; R37.1@42.561,34.544 41.061,34.544 ; R52.2@109.561,19.344 v1(109.561,26.344) ; 39.261,34.544 41.061,34.544
  Mid Layer 2 w0.3: v1(41.061,34.044) 42.961,32.144 108.861,32.144 109.561,31.444 v1(109.561,26.344)
A23: K24.3 R52.1 R63.1 R71.2 | length 26.3
  Top Layer w0.3: R71.2@98.761,9.244 102.061,9.244 ; K24.3@99.661,15.044 101.161,15.044 102.061,14.144 ; v2(102.061,9.944) 102.061,9.244 ; v2(102.061,11.644) 102.061,14.144 ; v2(102.568,14.329) 102.246,14.329 102.061,14.144 ; R63.1@106.761,9.244 102.061,9.244 ; v2(108,14.3) 109.561,15.861 R52.1@109.561,18.144
  Mid Layer 1 w0.3: v2(102.061,9.944) v2(102.061,11.644) ; v2(102.568,14.329) 102.649,14.329 102.82,14.5 107.719,14.5 107.919,14.3 v2(108,14.3)
A_N: B2.8 P8.6 P9.6 R81.2 | length 54.8
  Top Layer w0.2: v1@9.425,27.356 v1(9.425,27.4) 9.425,27.468 9.475,27.518 9.475,28.2 B2.8@9.525,28.25 ; v1(9.625,15.1) 9.614,15.09 9.614,13.957 R81.2@9.604,13.946 9.604,11.071 P9.6@9.865,10.81 ; v1(9.8,62.5) 9.8,63.935 P8.6@9.865,64
  Mid Layer 2 w0.2: v1(9.625,15.1) 9.625,27.132 9.425,27.332 v1(9.425,27.4) 9.977,27.952 9.977,61.004 10.1,61.127 10.1,62.132 9.8,62.432 v1(9.8,62.5)
Ac11: K1.2 P1.3 | length 17.1
  Top Layer w0.3: K1.2@105.86,52.74 v2(105.86,53.54)
  Bottom Layer w0.3: P1.3@103.36,68.54 104.66,67.24 104.66,54.34 105.43,53.57 105.83,53.57 v2(105.86,53.54)
Ac12: K2.2 P1.11 | length 17.5
  Top Layer w0.3: K2.2@96.66,52.74 v2(96.66,53.54)
  Bottom Layer w0.3: P1.11@93.2,68.54 94.56,67.18 94.56,64.14 95.16,63.54 95.16,54.54 96.16,53.54 v2(96.66,53.54)
Ac13: K3.2 P1.19 | length 18.7
  Top Layer w0.3: K3.2@87.46,52.74 v2(87.46,53.54)
  Bottom Layer w0.3: P1.19@83.04,68.54 84.36,67.22 84.36,54.84 85.66,53.54 v2(87.46,53.54)
Ac14: K4.2 P1.27 | length 19.1
  Top Layer w0.3: K4.2@78.26,52.74 v2(78.26,53.54)
  Bottom Layer w0.3: P1.27@72.88,68.54 74.26,67.16 74.26,62.14 75.16,61.24 75.16,54.84 76.46,53.54 v2(78.26,53.54)
Ac21: K9.2 P3.3 | length 17.2
  Top Layer w0.3: v2(35.261,41.941) K9.2@35.261,42.741
  Bottom Layer w0.3: v2(35.261,41.941) 37.1,40.102 37.1,32.2 38.3,31 38.3,28.52 P3.3@37.08,27.3
Ac22: K10.2 P3.11 | length 16.8
  Top Layer w0.3: v2(44.4,41.9) 44.4,42.681 K10.2@44.461,42.741
  Bottom Layer w0.3: v2(44.4,41.9) 45.6,40.7 45.6,31.5 46,31.1 46,28.3 47,27.3 P3.11@47.24,27.3
Ac23: K11.2 P3.19 | length 17
  Top Layer w0.3: v2(53.6,41.9) 53.6,42.681 K11.2@53.661,42.741
  Bottom Layer w0.3: v2(53.6,41.9) 53.6,39.309 54.9,38.009 54.9,32.6 56.1,31.4 56.1,28.6 P3.19@57.4,27.3
Ac24: K12.2 P3.27 | length 17.4
  Top Layer w0.3: v2(62.8,41.9) 62.8,42.681 K12.2@62.861,42.741
  Bottom Layer w0.3: v2(62.8,41.9) 62.8,39.059 64,37.859 64,33.3 66.3,31 66.3,28.56 P3.27@67.56,27.3
Ac31: K17.2 P5.3 | length 16.6
  Top Layer w0.3: v2(35.2,16.4) 35.2,17.181 K17.2@35.261,17.241
  Bottom Layer w0.3: v2(35.2,16.4) 35.2,14.159 36.4,12.959 36.4,7.65 35.8,7.05 35.8,3.5 37.08,2.22 P5.3@37.08,1.989
Ac32: K18.2 P5.11 | length 16.5
  Top Layer w0.3: v2(44.4,16.4) 44.4,17.181 K18.2@44.46,17.242
  Bottom Layer w0.3: v2(44.4,16.4) 44.4,14.3 46,12.7 46,3.229 P5.11@47.24,1.989
Ac33: K19.2 P5.19 | length 16.9
  Top Layer w0.3: v2(53.6,16.4) 53.6,17.181 K19.2@53.66,17.242
  Bottom Layer w0.3: v2(53.6,16.4) 53.6,14.2 54.8,13 54.8,7.1 56.1,5.8 56.1,3.289 P5.19@57.4,1.989
Ac34: K20.2 P5.27 | length 17.2
  Top Layer w0.3: v2(62.8,16.4) 62.8,17.181 K20.2@62.861,17.241
  Bottom Layer w0.3: v2(62.8,16.4) 63.7,15.5 63.7,8.8 66.3,6.2 66.3,3.249 P5.27@67.56,1.989
Ac41: K30.2 P7.3 | length 13.8
  Top Layer w0.3: K30.2@116.461,7.942 116.461,8.592 117.469,9.6 122,9.6 123.9,7.7 126.68,7.7 P7.3@127.9,8.92
Ac42: K29.2 P7.11 | length 13.7
  Top Layer w0.3: K29.2@116.461,17.642 116.461,18.292 117.469,19.3 122.7,19.3 124.2,17.8 126.62,17.8 P7.11@127.9,19.08
Ac43: K28.2 P7.19 | length 13.2
  Top Layer w0.3: K28.2@116.461,27.342 116.461,27.992 117.269,28.8 123.5,28.8 124.2,28.1 126.76,28.1 P7.19@127.9,29.24
Ac44: K27.2 P7.27 | length 13.1
  Top Layer w0.3: K27.2@116.461,37.042 116.461,37.692 117.369,38.6 123.4,38.6 123.8,38.2 126.7,38.2 P7.27@127.9,39.4
Ac45: K26.2 P7.35 | length 13
  Top Layer w0.3: K26.2@116.461,46.742 116.461,47.392 116.661,47.592 117.276,47.592 117.984,48.3 126.64,48.3 P7.35@127.9,49.56
Ac46: K25.2 P7.43 | length 13.2
  Top Layer w0.3: K25.2@116.461,56.342 116.461,56.992 117.569,58.1 117.869,58.4 126.58,58.4 P7.43@127.9,59.72
Ad11: K1.4 P1.2 | length 10.5
  Top Layer w0.3: v2(105.86,56.34) K1.4@105.86,57.14
  Bottom Layer w0.3: v2(105.86,56.34) 105.88,56.36 105.88,65.98 P1.2@105.9,66
Ad12: K2.4 P1.10 | length 10.8
  Top Layer w0.3: v2(96.66,56.34) K2.4@96.66,57.14
  Bottom Layer w0.3: P1.10@95.74,66 96.66,65.08 v2(96.66,56.34)
Ad13: K3.4 P1.18 | length 11.2
  Top Layer w0.3: v2(87.46,56.34) K3.4@87.46,57.14
  Bottom Layer w0.3: P1.18@85.58,66 87.46,64.12 v2(87.46,56.34)
Ad14: K4.4 P1.26 | length 11.6
  Top Layer w0.3: v2(78.26,56.34) K4.4@78.26,57.14
  Bottom Layer w0.3: P1.26@75.42,66 75.42,63.28 77.36,61.34 77.36,57.24 v2(78.26,56.34)
Ad15: K5.4 P2.1 | length 20.5
  Top Layer w0.3: K5.4@69,57.1 69.037,57.137 K5.4@69.06,57.137 69.1,57.097 v2(69.1,56.2)
  Bottom Layer w0.3: P2.1@57.4,68.54 58.86,68.54 65.7,61.7 65.7,57.1 66.6,56.2 v2(69.1,56.2)
Ad16: K6.4 P2.5 | length 17.8
  Top Layer w0.3: K6.4@59.86,57.137 59.9,57.097 v2(59.9,56.2)
  Bottom Layer w0.3: P2.5@52.32,68.54 53.5,67.36 53.5,64.9 55.7,62.7 58.1,62.7 59.9,60.9 v2(59.9,56.2)
Ad17: K7.4 P2.9 | length 14.7
  Top Layer w0.3: v2(50.6,56.2) 50.6,57.077 K7.4@50.66,57.137
  Bottom Layer w0.3: P2.9@47.24,68.54 48.5,67.28 48.5,62.341 50.6,60.241 v2(50.6,56.2)
Ad18: K8.4 P2.13 | length 14.2
  Top Layer w0.3: v2(41.5,56.2) 41.5,57.097 K8.4@41.46,57.137 41.563,57.137 K8.4@41.6,57.1
  Bottom Layer w0.3: v2(41.5,56.2) 40.9,56.8 40.9,67.28 P2.13@42.16,68.54
Ad21: K9.4 P3.2 | length 10.4
  Top Layer w0.3: K9.4@35.261,38.341 v2(35.261,39.141)
  Bottom Layer w0.3: P3.2@34.54,29.84 34.54,38.34 35.261,39.06 v2(35.261,39.141)
Ad22: K10.4 P3.10 | length 8.7
  Top Layer w0.3: v2(44.4,37.5) 44.4,38.287 K10.4@44.461,38.347
  Bottom Layer w0.3: v2(44.4,37.5) 44.4,37.419 44.7,37.119 P3.10@44.7,29.84
Ad23: K11.4 P3.18 | length 9.1
  Top Layer w0.3: v2(53.6,37.5) 53.6,38.287 K11.4@53.661,38.347
  Bottom Layer w0.3: v2(53.6,37.5) 53.6,31.1 P3.18@54.86,29.84
Ad24: K12.4 P3.26 | length 9.5
  Top Layer w0.3: v2(62.8,37.5) 62.8,38.287 K12.4@62.861,38.347
  Bottom Layer w0.3: v2(62.8,37.5) 62.8,32.06 P3.26@65.02,29.84
Ad25: K13.4 P4.1 | length 18.3
  Top Layer w0.3: K13.4@72.262,38.347 v2(72.262,39.147)
  Bottom Layer w0.3: v2(72.262,39.147) 72.262,36.038 81,27.3 P4.1@83.04,27.3
Ad26: K14.4 P4.5 | length 16.8
  Top Layer w0.3: K14.4@81.462,38.347 v2(81.462,39.147)
  Bottom Layer w0.3: v2(81.462,39.147) 81.462,34.438 83.3,32.6 85.6,32.6 86.9,31.3 86.9,28.52 P4.5@88.12,27.3
Ad27: K15.4 P4.9 | length 13.8
  Top Layer w0.3: K15.4@90.662,38.347 v2(90.662,39.147)
  Bottom Layer w0.3: v2(90.662,39.147) 90.662,32.238 92,30.9 92,28.3 93,27.3 P4.9@93.2,27.3
Ad28: K16.4 P4.13 | length 11.7
  Top Layer w0.3: v2(99.862,37.547) K16.4@99.862,38.347
  Bottom Layer w0.3: P4.13@98.28,27.3 99.5,28.52 99.5,37.186 v2(99.862,37.547)
Ad31: K17.4 P5.2 | length 8.6
  Top Layer w0.3: v2(35.2,12) 35.2,12.786 K17.4@35.261,12.847
  Bottom Layer w0.3: P5.2@34.54,4.529 34.54,11.34 v2(35.2,12)
Ad32: K18.4 P5.10 | length 8.5
  Top Layer w0.3: v2(44.4,12) 44.4,12.787 K18.4@44.46,12.848
  Bottom Layer w0.3: v2(44.4,12) 44.4,11.919 44.7,11.619 P5.10@44.7,4.529
Ad33: K19.4 P5.18 | length 8.9
  Top Layer w0.3: v2(53.6,12) 53.6,12.787 K19.4@53.66,12.848
  Bottom Layer w0.3: v2(53.6,12) 53.6,5.789 P5.18@54.86,4.529
Ad34: K20.4 P5.26 | length 9.3
  Top Layer w0.3: v2(62.8,12) 62.8,12.786 K20.4@62.861,12.847
  Bottom Layer w0.3: v2(62.8,12) 62.8,8 65.02,5.78 P5.26@65.02,4.529
Ad35: K21.4 P6.1 | length 20.1
  Top Layer w0.3: K21.4@72.061,12.847 72.1,12.887 v2(72.1,13.7)
  Bottom Layer w0.3: v2(72.1,13.7) 74.7,13.7 79.3,9.1 79.3,3.3 80.6,2 P6.1@83.04,2
Ad36: K22.4 P6.5 | length 15.4
  Top Layer w0.3: K22.4@81.261,12.847 81.3,12.887 v2(81.3,13.7)
  Bottom Layer w0.3: v2(81.3,13.7) 82.1,12.9 82.1,10 86.9,5.2 86.9,3.22 87.271,2.849 P6.5@88.12,2
Ad37: K23.4 P6.9 | length 13.7
  Top Layer w0.3: K23.4@90.46,12.848 90.5,12.887 v2(90.5,13.7)
  Bottom Layer w0.3: v2(90.5,13.7) 90.5,7.4 91.9,6 91.9,3.2 93.1,2 P6.9@93.2,2
Ad38: K24.4 P6.13 | length 13.2
  Top Layer w0.3: K24.4@99.661,12.847 99.7,12.887 v2(99.7,13.7)
  Bottom Layer w0.3: P6.13@98.28,2 99.5,3.22 99.5,13.419 99.7,13.619 v2(99.7,13.7)
Ad41: K30.4 P7.2 | length 5.2
  Top Layer w0.3: K30.4@120.855,7.942 122.258,7.942 123.8,6.4 125.34,6.4 P7.2@125.36,6.38
Ad42: K29.4 P7.10 | length 5
  Top Layer w0.3: K29.4@120.855,17.642 122.958,17.642 124.06,16.54 P7.10@125.36,16.54
Ad43: K28.4 P7.18 | length 4.8
  Top Layer w0.3: K28.4@120.855,27.342 122.558,27.342 123,26.9 125.16,26.9 P7.18@125.36,26.7
Ad44: K27.4 P7.26 | length 4.6
  Top Layer w0.3: K27.4@120.855,37.042 121.037,36.86 P7.26@125.36,36.86
Ad45: K26.4 P7.34 | length 4.7
  Top Layer w0.3: K26.4@120.855,46.742 120.855,46.82 121.055,47.02 P7.34@125.36,47.02
Ad46: K25.4 P7.42 | length 4.9
  Top Layer w0.3: K25.4@120.855,56.342 122.642,56.342 123.48,57.18 P7.42@125.36,57.18
AGND1: P1.4 P1.8 P1.12 P1.16 P1.20 P1.24 P1.28 P1.32 P2.2 P2.4 P2.6 P2.8 P2.10 P2.12 P2.14 P2.16 P2.18 P2.20
  other v1: 35.9,51.6 37.5,51.6 39.1,51.6 40.7,51.6 42.3,51.6 43.9,51.6 45.5,51.6 47.1,51.6 48.7,51.6 50.3,51.6 51.9,51.6 53.5,51.6 55.1,51.6 56.7,51.6 58.3,51.6 59.9,51.6 61.5,51.6 63.1,51.6 64.7,51.6 66.3,51.6 67.9,51.6 69.5,51.6 71.1,51.6 72.7,51.6 74.3,51.6 75.9,51.6 77.5,51.6 79.1,51.6 80.7,51.6 82.3,51.6 83.9,51.6 85.5,51.6 87.1,51.6 88.7,51.6 90.3,51.6 91.9,51.6 93.5,51.6 95.1,51.6 96.7,51.6 98.3,51.6 99.9,51.6 101.5,51.6 103.1,51.6 104.7,51.6 106.3,51.6 110.5,51.6 110.5,53.2 110.5,54.8 110.5,56.4 110.5,57.9 110.5,59.5 110.5,61.1 110.5,62.7 110.5,64.3 110.5,65.9 110.5,67.5
AGND2: P3.4 P3.8 P3.12 P3.16 P3.20 P3.24 P3.28 P3.32 P4.2 P4.4 P4.6 P4.8 P4.10 P4.12 P4.14 P4.16 P4.18 P4.20
  other v1: 110.6,28 110.6,29.6 33.3,29.8 110.6,31.2 33.3,31.5 110.6,32.8 33.3,33.1 110.6,34.3 33.3,34.7 110.6,35.9 33.3,36.3 110.6,37.5 33.3,37.9 110.6,39.1 33.3,39.5 110.6,40.7 33.3,41.1 110.6,42.3 33.3,42.7 35.9,43.9 37.5,43.9 39.1,43.9 40.7,43.9 42.3,43.9 43.9,43.9 45.5,43.9 47.1,43.9 48.7,43.9 50.3,43.9 51.9,43.9 53.5,43.9 55.1,43.9 56.7,43.9 58.3,43.9 59.9,43.9 61.5,43.9 63.1,43.9 64.7,43.9 66.3,43.9 67.9,43.9 69.5,43.9 71.1,43.9 72.7,43.9 74.3,43.9 75.9,43.9 77.5,43.9 79.1,43.9 80.7,43.9 82.3,43.9 83.9,43.9 85.5,43.9 87.1,43.9 88.7,43.9 90.3,43.9 91.9,43.9 93.5,43.9 95.1,43.9 96.7,43.9 98.3,43.9 99.9,43.9 101.5,43.9 103.1,43.9 104.7,43.9 106.3,43.9 110.6,43.9
AGND3: P5.4 P5.8 P5.12 P5.16 P5.20 P5.24 P5.28 P5.32 P6.2 P6.4 P6.6 P6.8 P6.10 P6.12 P6.14 P6.16 P6.18 P6.20
  other v1: 110.6,8 110.6,9.6 110.6,11.2 110.6,12.8 110.6,14.4 110.6,16 110.6,17.6 35.9,18.1 37.5,18.1 39.1,18.1 40.7,18.1 42.3,18.1 43.9,18.1 45.5,18.1 47.1,18.1 48.7,18.1 50.3,18.1 51.9,18.1 53.5,18.1 55.1,18.1 56.7,18.1 58.3,18.1 59.9,18.1 61.5,18.1 63.1,18.1 64.7,18.1 66.3,18.1 67.9,18.1 69.5,18.1 71.1,18.1 72.7,18.1 74.3,18.1 75.9,18.1 77.5,18.1 79.1,18.1 80.7,18.1 82.3,18.1 83.9,18.1 85.5,18.1 87.1,18.1 88.7,18.1 90.3,18.1 91.9,18.1 93.5,18.1 95.1,18.1 96.7,18.1 98.3,18.1 99.9,18.1 101.5,18.1 103.1,18.1 104.7,18.1 106.3,18.1
AGND4: P7.4 P7.8 P7.12 P7.16 P7.20 P7.24 P7.28 P7.32 P7.36 P7.40 P7.44 P7.48
As11: P1.1 R1.2 | length 6.6
  Top Layer w0.3: R1.2@104.66,62.44 104.66,67.3 P1.1@105.9,68.54
As12: P1.9 R3.2 | length 6.6
  Top Layer w0.3: R3.2@94.56,62.44 94.56,67.36 P1.9@95.74,68.54
As13: P1.17 R5.2 | length 6.6
  Top Layer w0.3: R5.2@84.36,62.44 84.36,67.32 P1.17@85.58,68.54
As14: P1.25 R7.2 | length 6.6
  Top Layer w0.3: R7.2@74.26,62.44 74.26,67.38 P1.25@75.42,68.54
As18: P2.17 R9.2 | length 9.2
  Top Layer w0.3: R9.2@33.16,60.94 33.16,61.66 35.8,64.3 35.8,67.26 P2.17@37.08,68.54
As21: P3.1 R27.2 | length 6.5
  Top Layer w0.3: P3.1@34.54,27.3 35.8,28.56 35.8,31.7 36.361,32.262 R27.2@36.361,33.044
As22: P3.9 R29.2 | length 6.4
  Top Layer w0.3: P3.9@44.7,27.3 46,28.6 46,31.9 46.261,32.161 R29.2@46.261,33.044
As23: P3.17 R31.2 | length 6.5
  Top Layer w0.3: P3.17@54.86,27.3 56.1,28.54 56.1,31.3 55.461,31.939 R31.2@55.461,33.044
As24: P3.25 R33.2 | length 7
  Top Layer w0.3: R33.2@64.661,33.044 64.661,32.969 66.3,31.33 66.3,28.58 P3.25@65.02,27.3
As28: P4.17 R35.2 | length 10.7
  Top Layer w0.3: P4.17@103.36,27.3 103.36,27.56 104.3,28.5 106.9,28.5 107.961,29.561 R35.2@107.961,34.544
As31: P5.1 R55.2 | length 6.6
  Top Layer w0.3: P5.1@34.54,1.989 35.8,3.249 35.8,5.6 36.161,5.961 R55.2@36.161,7.944
As32: P5.9 R57.2 | length 6.6
  Top Layer w0.3: P5.9@44.7,1.989 46,3.289 46,7.494 46.061,7.554 46.061,7.744 R57.2@46.261,7.944
As33: P5.17 R59.2 | length 6.6
  Top Layer w0.3: P5.17@54.86,1.989 56.2,3.329 56.2,6 56.461,6.261 R59.2@56.461,7.944
As34: P5.25 R61.2 | length 6.6
  Top Layer w0.3: P5.25@65.02,1.989 66.3,3.269 66.3,5.3 66.561,5.561 R61.2@66.561,7.944
As38: P6.17 R63.2 | length 10.5
  Top Layer w0.3: P6.17@103.36,2 103.36,2.26 104.4,3.3 106.7,3.3 107.961,4.561 R63.2@107.961,9.244
As41: K30.3 P7.1 | length 11.4
  Top Layer w0.3: K30.3@118.658,7.942 118.658,7.292 120.95,5 126.52,5 P7.1@127.9,6.38
As42: K29.3 P7.9 | length 11.1
  Top Layer w0.3: K29.3@118.658,17.642 118.658,16.992 119.35,16.3 123,16.3 124.04,15.26 126.62,15.26 P7.9@127.9,16.54
As43: K28.3 P7.17 | length 11
  Top Layer w0.3: K28.3@118.658,27.342 118.658,26.692 119.444,25.906 124.194,25.906 124.747,25.353 126.553,25.353 P7.17@127.9,26.7
As44: K27.3 P7.25 | length 10.7
  Top Layer w0.3: K27.3@118.658,37.042 118.658,36.392 119.433,35.617 126.657,35.617 P7.25@127.9,36.86
As45: K26.3 P7.33 | length 10.8
  Top Layer w0.3: K26.3@118.658,46.742 118.658,46.092 119.35,45.4 124.2,45.4 124.511,45.711 126.591,45.711 P7.33@127.9,47.02
As46: K25.3 P7.41 | length 11.1
  Top Layer w0.3: K25.3@118.658,56.342 118.658,55.692 118.858,55.492 119.35,55 123.1,55 124,55.9 126.62,55.9 P7.41@127.9,57.18
B1: K1.6 R2.1 R18.1 R26.2 | length 25.9
  Top Layer w0.3: R18.1@98.76,59.44 101.06,59.44 102.06,58.44 ; K1.6@99.66,54.94 101.46,54.94 102.06,55.54 ; v1(102.06,59.14) 102.06,58.44 ; v1(103.26,61.54) R2.1@103.26,62.44 ; R26.2@107.86,48.34 107.86,53.14 106.86,54.14 102.46,54.14 102.06,54.54 102.06,55.54 ; 102.06,55.54 102.06,58.44
  Mid Layer 1 w0.3: v1(102.06,59.14) 103.26,60.34 v1(103.26,61.54)
B2: K16.6 R26.1 R36.1 R51.2 | length 22.7
  Top Layer w0.3: R51.2@98.761,36.044 103.461,36.044 ; R36.1@106.761,36.044 103.461,36.044 ; R26.1@107.861,47.144 107.861,41.344 107.061,40.544 105.861,40.544 103.961,40.544 103.461,40.044 103.461,36.044
B22: K9.6 R28.1 R45.1 R53.2 | length 97.5
  Top Layer w0.3: R28.1@37.861,33.044 v1(37.861,33.944) ; v2(39.261,36.144) 39.285,36.168 39.285,36.921 ; K9.6@41.661,40.544 40.361,40.544 39.285,39.468 39.285,36.921 ; R45.1@42.561,36.044 40.161,36.044 39.285,36.921 ; R53.2@108.061,19.344 R53.2@108.061,19.344 108.131,19.414 108.131,26.316 v1(108.159,26.344) v1@108.16,26.343
  Mid Layer 1 w0.3: v1(37.861,33.944) 37.861,34.344 39.231,35.714 39.231,36.114 v2(39.261,36.144)
  Mid Layer 2 w0.3: v2(39.261,36.144) 39.261,33.944 41.961,31.244 107.893,31.244 108.159,30.977 v1(108.159,26.344)
B23: K24.6 R53.1 R64.1 R78.2 | length 18.9
  Top Layer w0.3: R78.2@98.761,10.644 103.461,10.644 ; R64.1@106.761,10.644 103.461,10.644 ; R53.1@108.061,18.144 108.061,16.145 106.985,15.069 105.885,15.069 105.861,15.044 104.361,15.044 103.461,14.144 103.461,10.644
B_P: B2.9 J2.1 P8.7 P9.7 | length 59.8
  Top Layer w0.2: B2.9@10.025,28.25 10.075,28.2 10.075,27.518 10.125,27.468 v1(10.125,27.4) v1@10.125,27.358 ; v1(11.1,61.7) 11.1,60.225 P8.7@11.135,60.19 ; v1(11.125,15.3) 12.025,15.3 12.487,14.838 J2.1@12.487,13.954 12.396,13.864 12.396,12.936 11.764,12.304 11.764,8.449 11.135,7.82 P9.7@11.135,7
  Mid Layer 2 w0.2: v1@10.965,15.3 10.525,15.3 10.125,15.7 v1(10.125,27.4) 10.173,27.448 10.173,27.721 10.279,27.827 10.279,60.879 v1(11.1,61.7)
Bc11: K1.7 P1.7 | length 17.8
  Top Layer w0.3: K1.7@99.66,52.74 v2(99.66,53.54)
  Bottom Layer w0.3: P1.7@98.28,68.54 99.56,67.26 99.56,64.34 98.16,62.94 98.16,54.64 99.23,53.57 99.63,53.57 v2(99.66,53.54)
Bc12: K2.7 P1.15 | length 16.8
  Top Layer w0.3: K2.7@90.46,52.74 v2(90.46,53.54)
  Bottom Layer w0.3: P1.15@88.12,68.54 89.36,67.3 89.36,54.64 v2(90.46,53.54)
Bc13: K3.7 P1.23 | length 17.2
  Top Layer w0.3: K3.7@81.26,52.74 v2(81.26,53.54)
  Bottom Layer w0.3: P1.23@77.96,68.54 79.26,67.24 79.26,58.64 79.76,58.14 79.76,55.04 v2(81.26,53.54)
Bc14: K4.7 P1.31 | length 17.6
  Top Layer w0.3: K4.7@72.06,52.74 v2(72.06,53.54)
  Bottom Layer w0.3: P1.31@67.8,68.54 69.06,67.28 69.06,59.84 70.66,58.24 70.66,54.94 v2(72.06,53.54)
Bc21: K9.7 P3.7 | length 16.8
  Top Layer w0.3: v2(41.461,41.941) K9.7@41.461,42.741
  Bottom Layer w0.3: v2(41.461,41.941) 43.4,40.002 43.4,28.54 P3.7@42.16,27.3
Bc22: K10.7 P3.15 | length 17
  Top Layer w0.3: K10.7@50.861,42.741 50.9,42.703 v2(50.9,41.9)
  Bottom Layer w0.3: v2(50.9,41.9) 52.2,40.6 52.2,33.6 51,32.4 51,28.62 P3.15@52.32,27.3
Bc23: K11.7 P3.23 | length 16.4
  Top Layer w0.3: K11.7@60.062,42.741 60.1,42.703 v2(60.1,41.9)
  Bottom Layer w0.3: v2(60.1,41.9) 60.1,39.9 61.2,38.8 61.2,28.58 P3.23@62.48,27.3
Bc24: K12.7 P3.31 | length 17
  Top Layer w0.3: K12.7@69.261,42.741 69.3,42.703 v2(69.3,41.9)
  Bottom Layer w0.3: v2(69.3,41.9) 70.7,40.5 70.7,31.6 71.4,30.9 71.4,28.2 71.646,27.954 71.661,27.954 72.315,27.3 P3.31@72.64,27.3
Bc31: K17.7 P5.7 | length 17
  Top Layer w0.3: K17.7@41.661,17.241 41.7,17.203 v2(41.7,16.4)
  Bottom Layer w0.3: v2(41.7,16.4) 41.7,13.6 42.8,12.5 42.8,8.4 40.9,6.5 40.9,3.249 P5.7@42.16,1.989
Bc32: K18.7 P5.15 | length 16.5
  Top Layer w0.3: K18.7@50.861,17.242 50.9,17.203 v2(50.9,16.4)
  Bottom Layer w0.3: v2(50.9,16.4) 50.9,13.9 51.9,12.9 51.9,9.2 51.1,8.4 51.1,3.209 P5.15@52.32,1.989
Bc33: K19.7 P5.23 | length 16.3
  Top Layer w0.3: K19.7@60.061,17.242 60.1,17.203 v2(60.1,16.4)
  Bottom Layer w0.3: v2(60.1,16.4) 60.1,13.8 61.2,12.7 61.2,3.269 P5.23@62.48,1.989
Bc34: K20.7 P5.31 | length 16.7
  Top Layer w0.3: K20.7@69.262,17.241 69.3,17.203 v2(69.3,16.4)
  Bottom Layer w0.3: v2(69.3,16.4) 69.3,13.8 71.4,11.7 71.4,3.229 P5.31@72.64,1.989
Bc41: K30.7 P7.7 | length 14.1
  Top Layer w0.3: K30.7@116.461,14.343 116.461,14.993 117.168,15.7 121.6,15.7 124.5,12.8 126.7,12.8 P7.7@127.9,14
Bc42: K29.7 P7.15 | length 13.9
  Top Layer w0.3: K29.7@116.461,24.043 116.461,24.693 117.168,25.4 121.6,25.4 124.1,22.9 126.64,22.9 P7.15@127.9,24.16
Bc43: K28.7 P7.23 | length 13.7
  Top Layer w0.3: K28.7@116.461,33.743 116.461,34.393 117.167,35.099 122.501,35.099 124.5,33.1 126.68,33.1 P7.23@127.9,34.32
Bc44: K27.7 P7.31 | length 13.6
  Top Layer w0.3: K27.7@116.461,43.443 116.461,44.093 117.168,44.8 122.7,44.8 124.3,43.2 126.62,43.2 P7.31@127.9,44.48
Bc45: K26.7 P7.39 | length 13.4
  Top Layer w0.3: K26.7@116.461,53.143 116.461,53.793 117.168,54.5 122.5,54.5 123.6,53.4 126.66,53.4 P7.39@127.9,54.64
Bc46: K25.7 P7.47 | length 13.3
  Top Layer w0.3: K25.7@116.461,62.743 116.461,63.393 117.368,64.3 123.1,64.3 123.8,63.6 126.8,63.6 127.9,64.7 P7.47@127.9,64.8
Bd11: K1.5 P1.6 | length 10.9
  Top Layer w0.3: v2(99.66,56.34) K1.5@99.66,57.14
  Bottom Layer w0.3: v2(99.66,56.34) 100.82,57.5 P1.6@100.82,66
Bd12: K2.5 P1.14 | length 10.5
  Top Layer w0.3: v2(90.46,56.34) K2.5@90.46,57.14
  Bottom Layer w0.3: v2(90.46,56.34) 90.517,56.397 90.517,65.857 P1.14@90.66,66
Bd13: K3.5 P1.22 | length 10.8
  Top Layer w0.3: v2(81.26,56.34) K3.5@81.26,57.14
  Bottom Layer w0.3: P1.22@80.5,66 80.5,65.708 81.26,64.948 v2(81.26,56.34)
Bd14: K4.5 P1.30 | length 11.2
  Top Layer w0.3: v2(72.06,56.34) K4.5@72.06,57.14
  Bottom Layer w0.3: P1.30@70.34,66 70.34,60.76 72.06,59.04 v2(72.06,56.34)
Bd15: K5.5 P2.3 | length 18.6
  Top Layer w0.3: K5.5@62.659,57.137 62.7,57.096 v2(62.7,56.2)
  Bottom Layer w0.3: P2.3@54.86,68.54 56.1,67.3 56.1,65 57.1,64 60.6,64 62.7,61.9 v2(62.7,56.2)
Bd16: K6.5 P2.7 | length 14.8
  Top Layer w0.3: K6.5@53.459,57.137 53.5,57.096 v2(53.5,56.2)
  Bottom Layer w0.3: P2.7@49.78,68.54 51,67.32 51,62.391 53.5,59.891 v2(53.5,56.2)
Bd17: K7.5 P2.11 | length 14.2
  Top Layer w0.3: K7.5@44.259,57.137 44.3,57.096 v2(44.3,56.2)
  Bottom Layer w0.3: v2(44.3,56.2) 43.4,57.1 43.4,67.24 P2.11@44.7,68.54
Bd18: K8.5 P2.15 | length 15.2
  Top Layer w0.3: K8.5@35.059,57.137 35.1,57.096 v2(35.1,56.2)
  Bottom Layer w0.3: v2(35.1,56.2) 35.1,61.8 38.4,65.1 38.4,67.32 P2.15@39.62,68.54
Bd21: K9.5 P3.6 | length 10.9
  Top Layer w0.3: K9.5@41.461,38.341 v2(41.461,39.141)
  Bottom Layer w0.3: P3.6@39.62,29.84 39.62,34.52 41.461,36.361 v2(41.461,39.141)